# EAGLE board SparkFun_ProMicro_RP2350-Panel (EAGLE 9.6.2), part 1 of 10
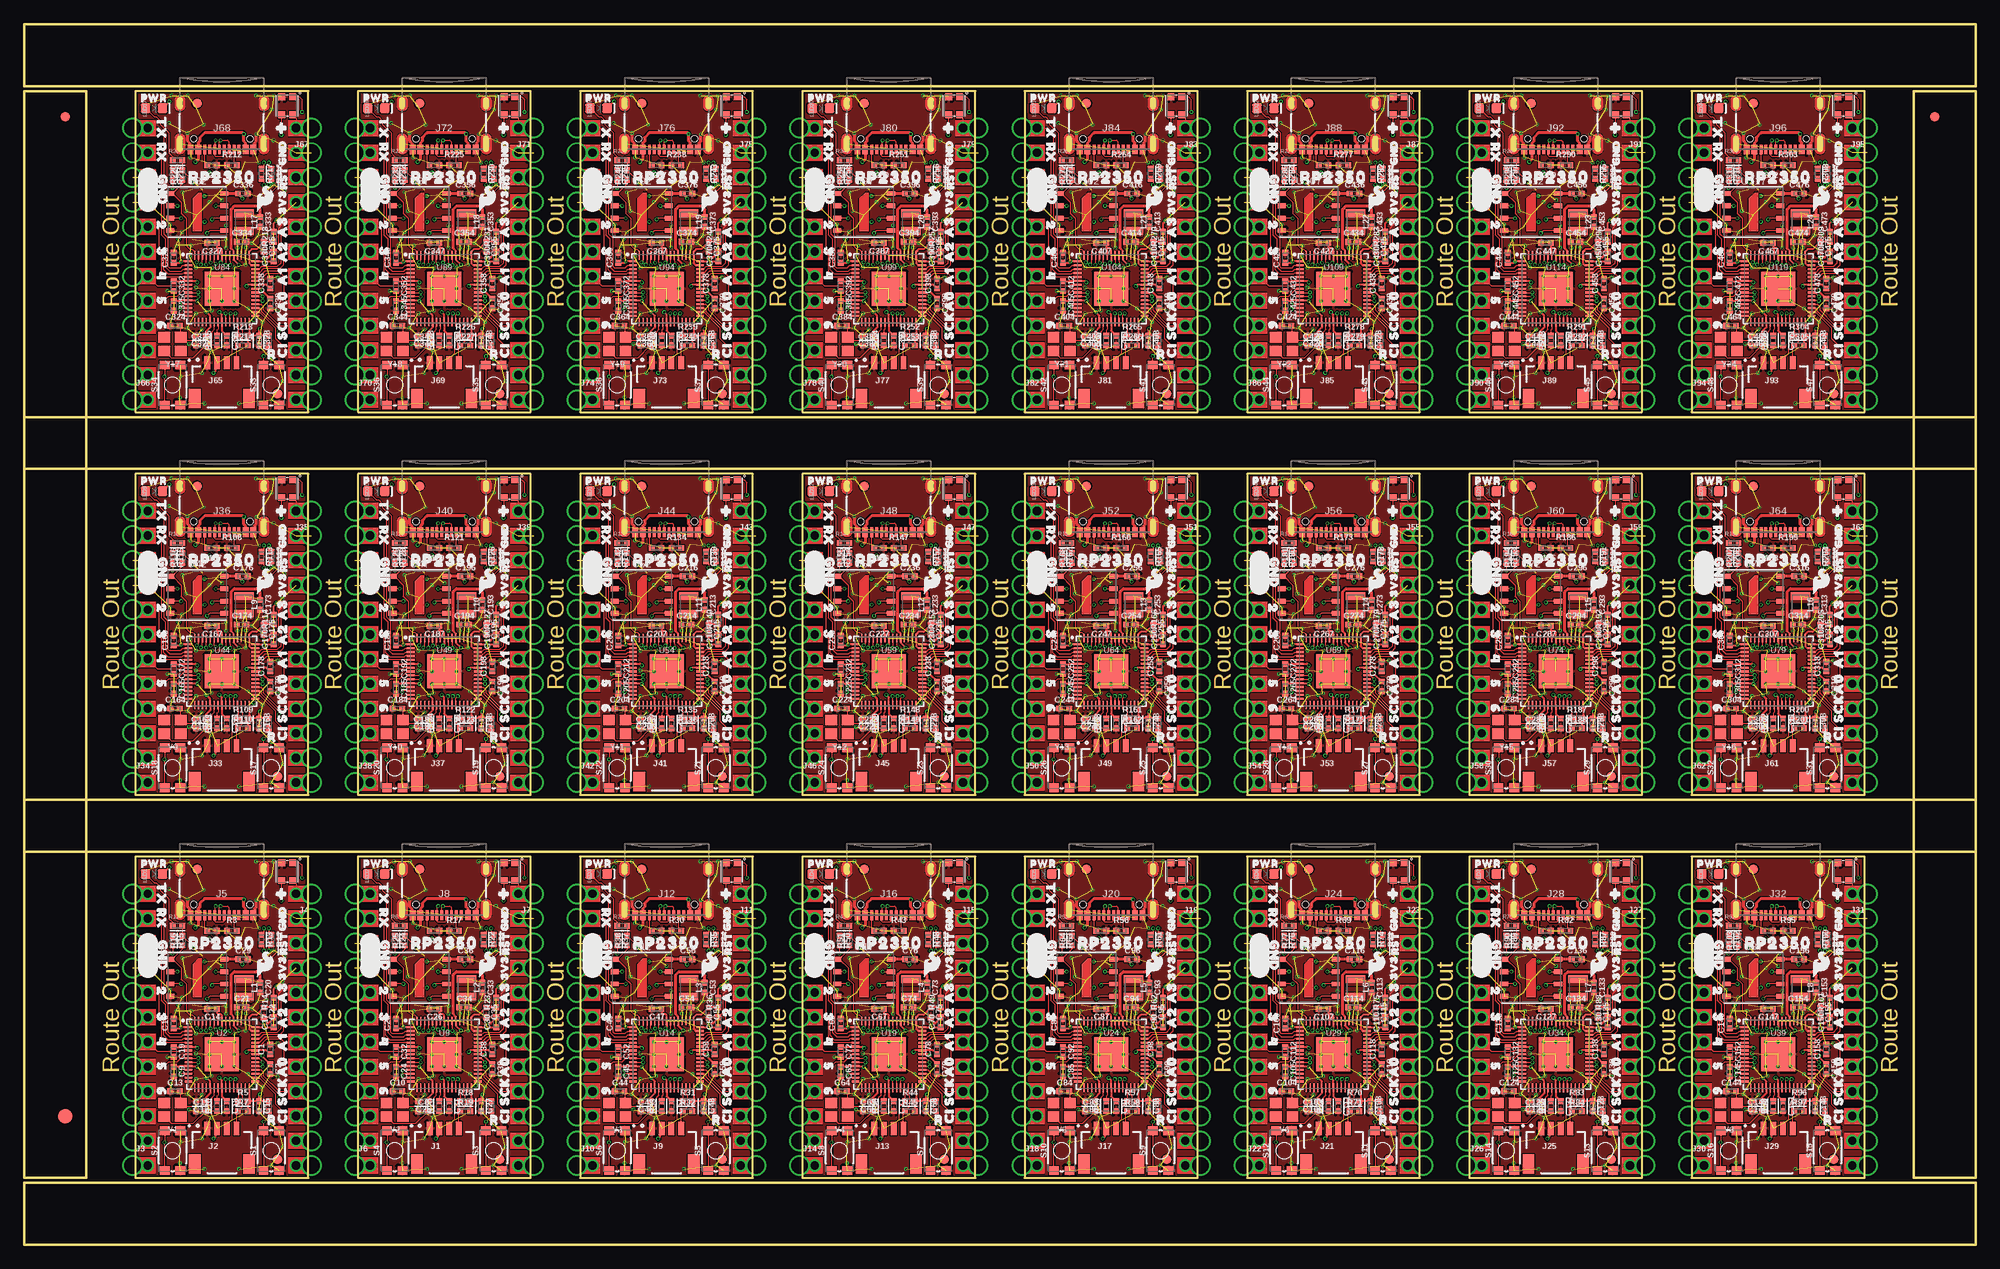
[diagram p0: board, top side]
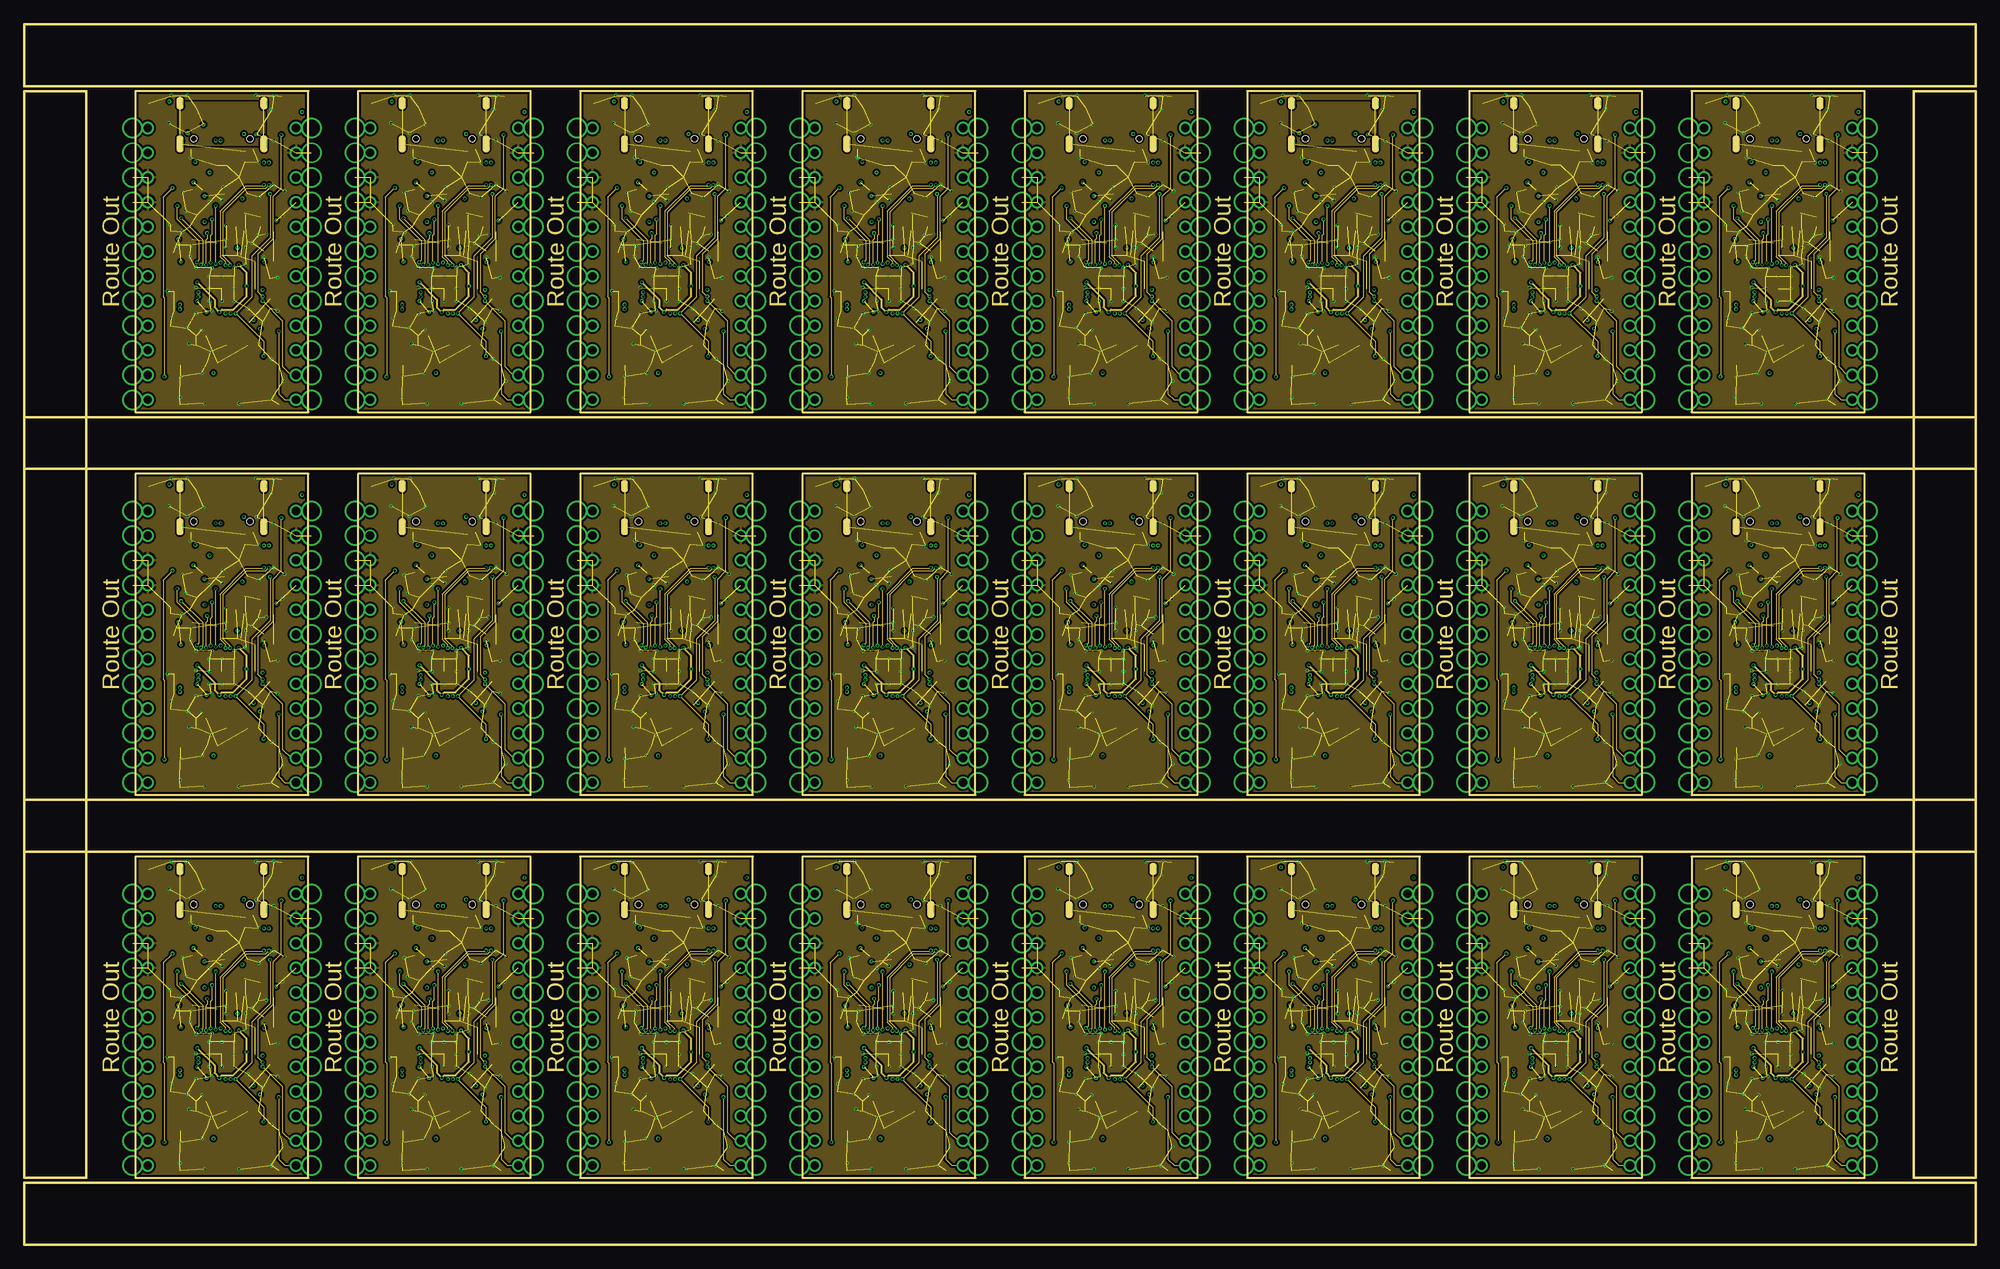
[diagram p1: board, inner layer 2]
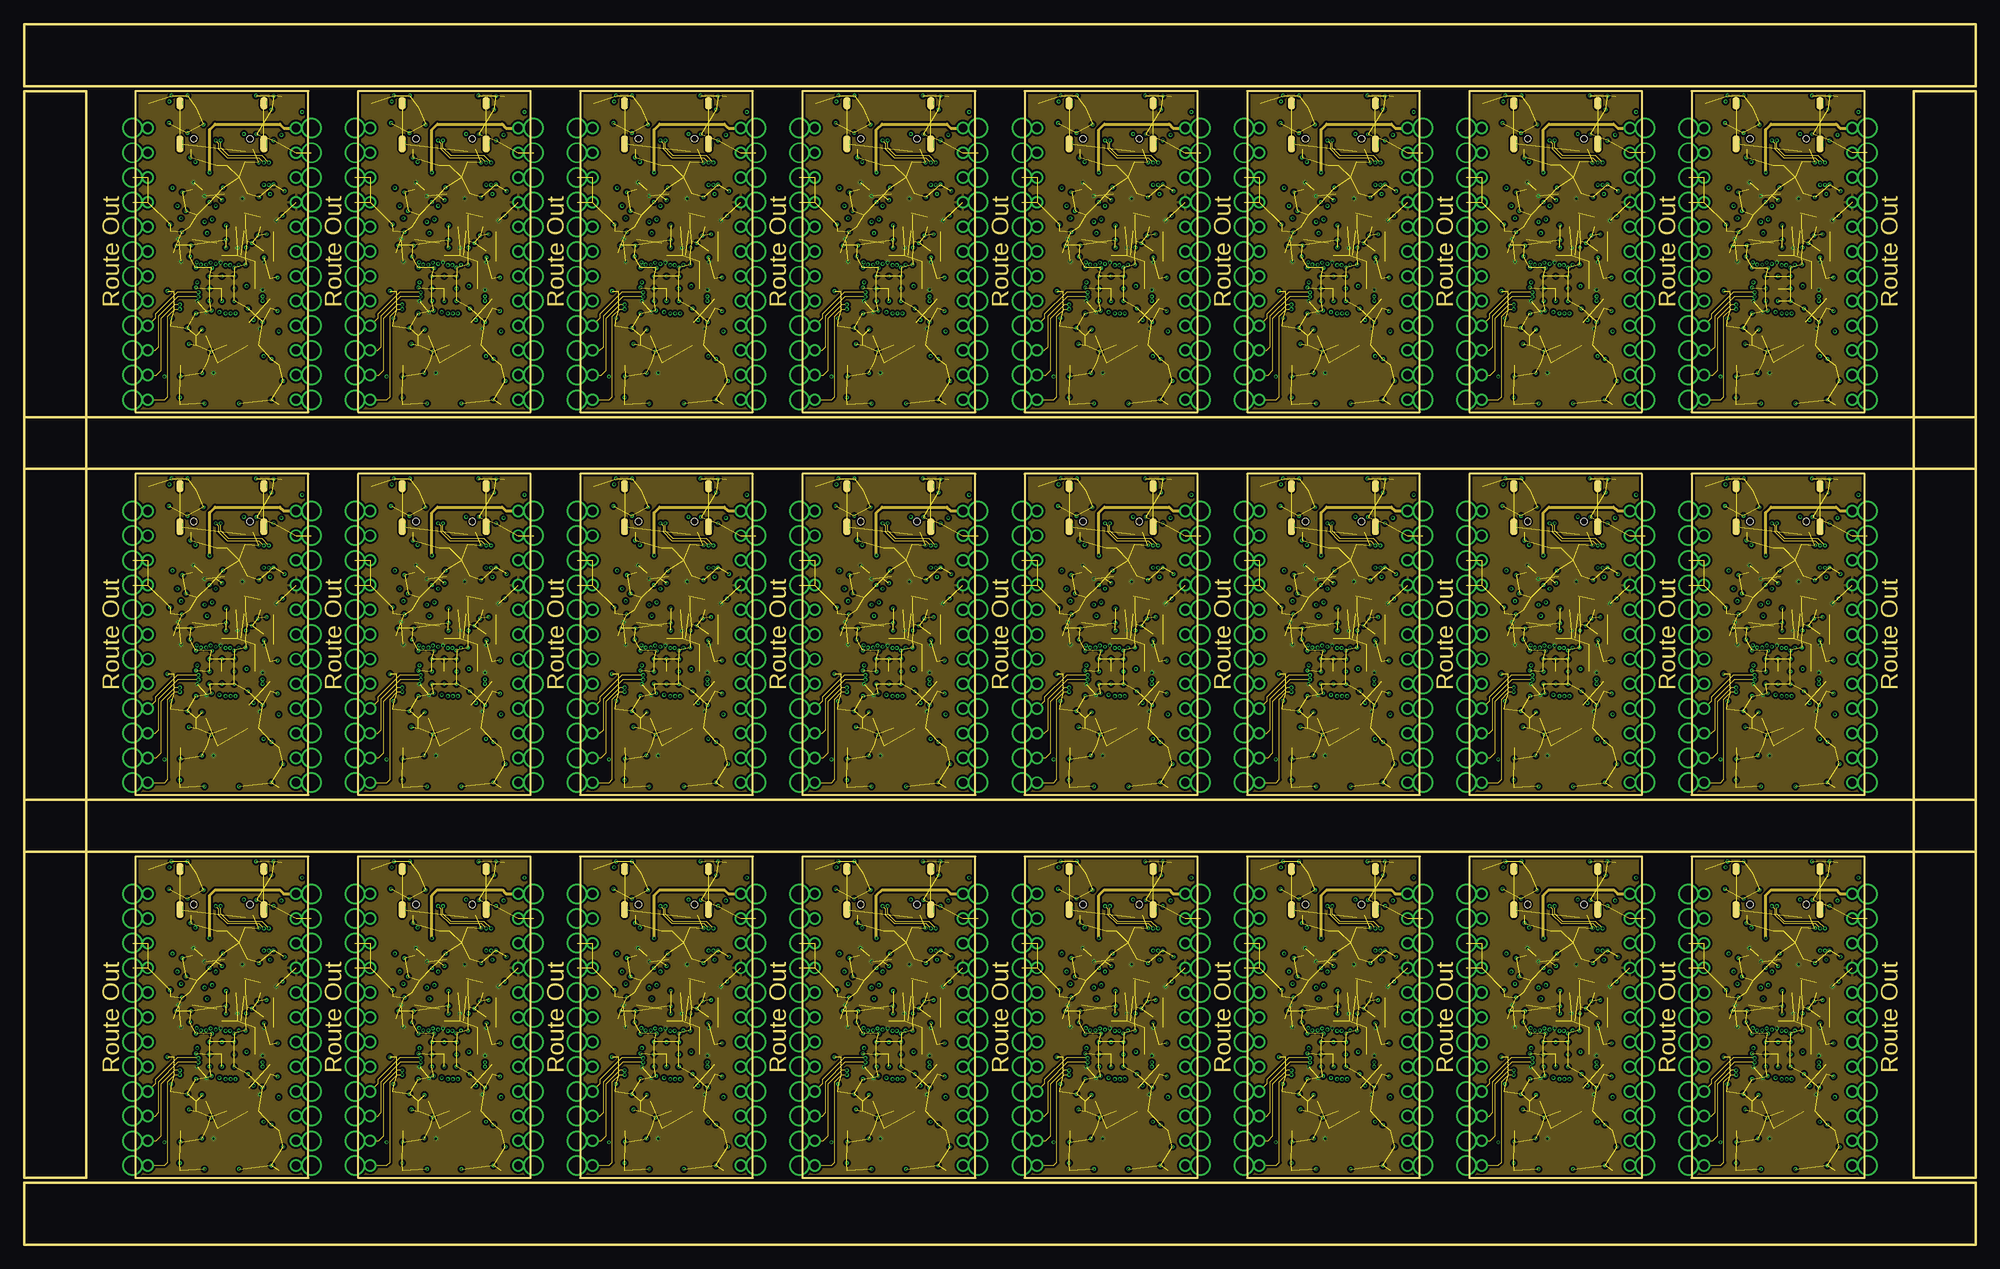
[diagram p2: board, inner layer 15]
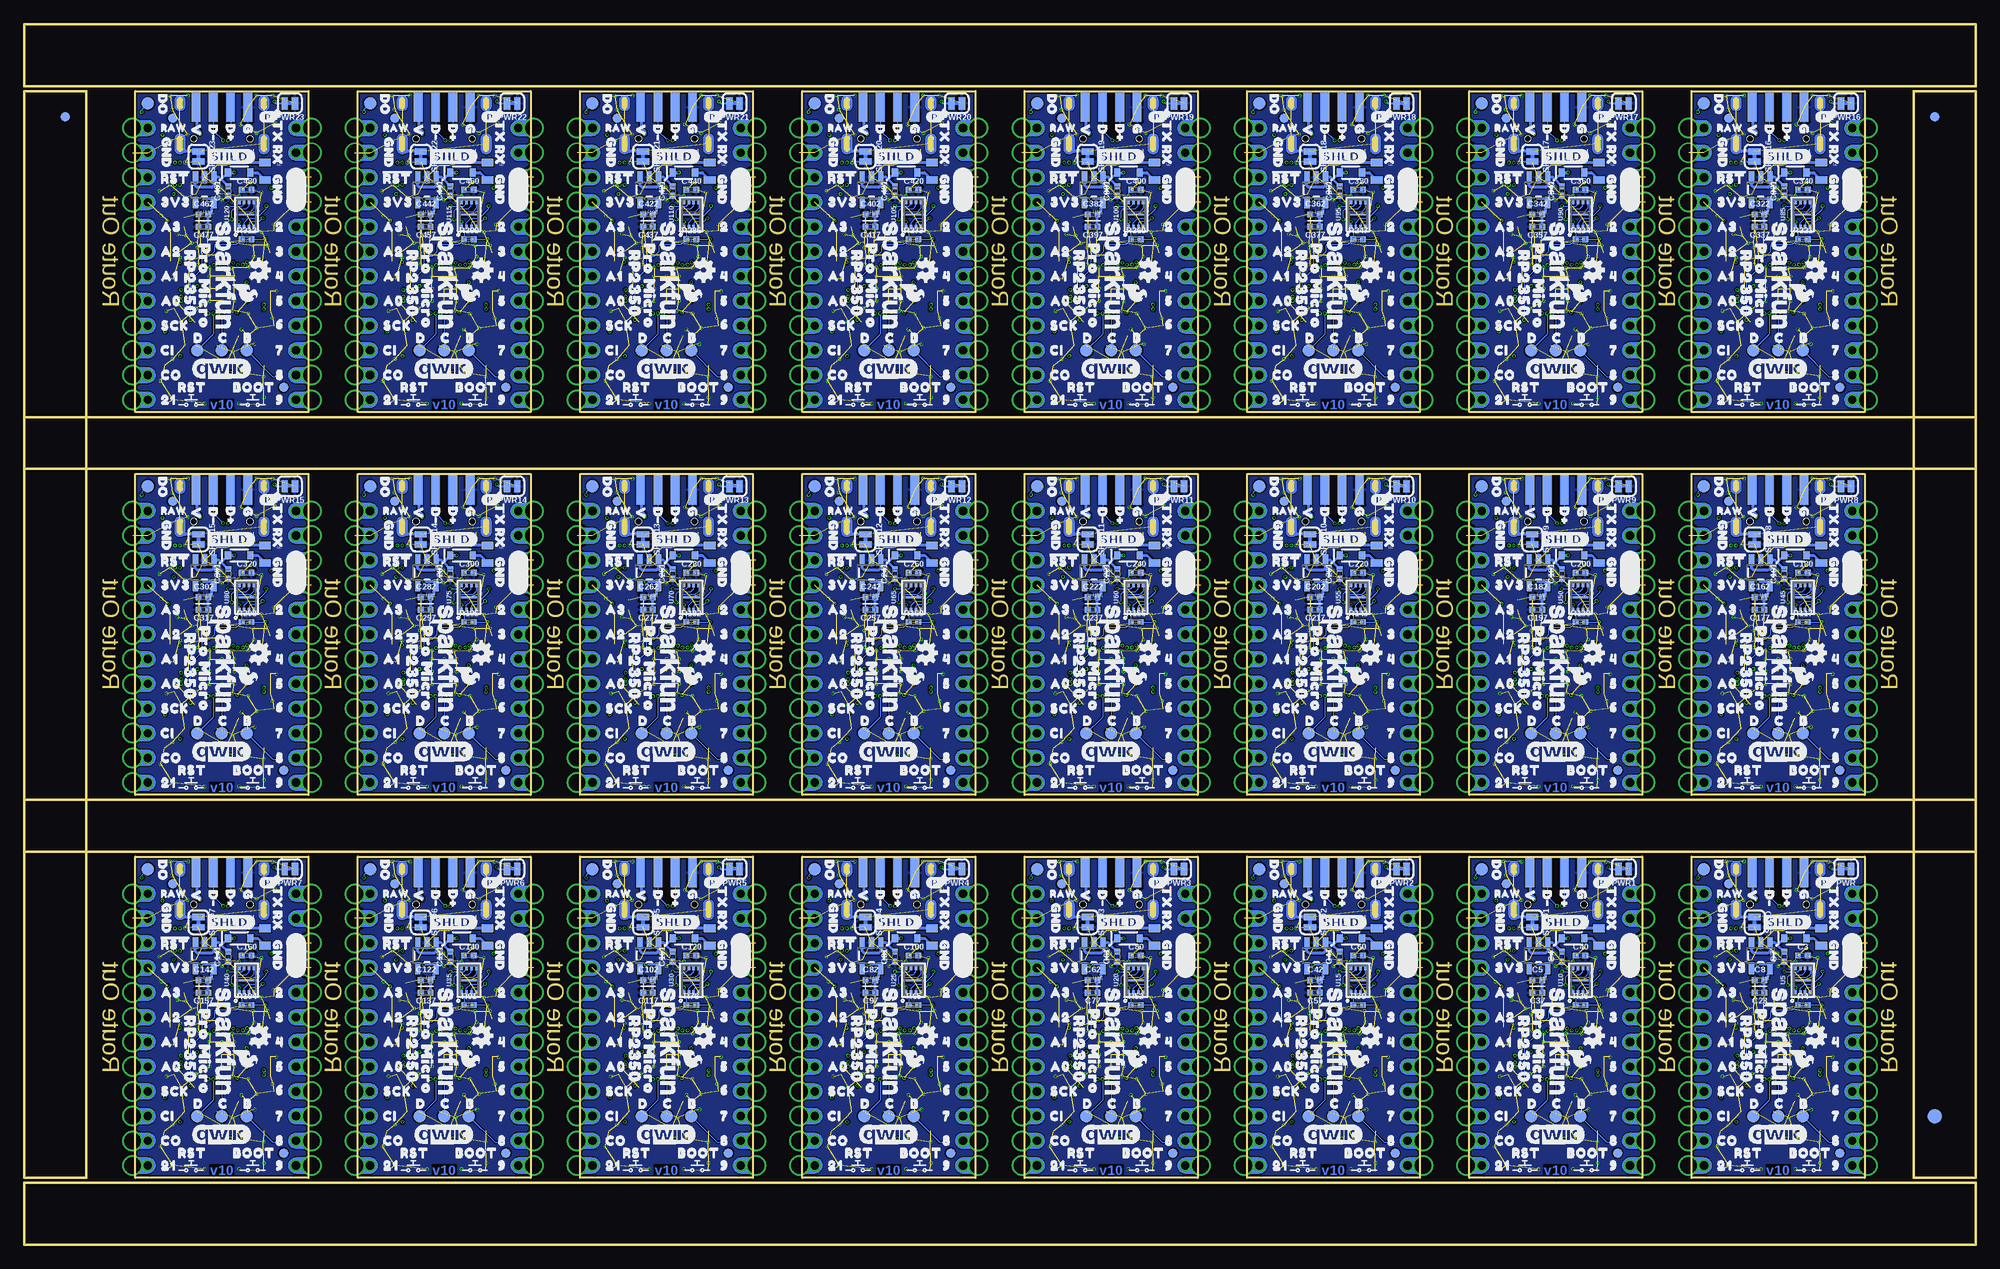
[diagram p3: board, bottom side, seen from below]

Size 200.66 x 125.48 mm. Coordinates in mm from the lower left corner, seen from the top.
Outline: 11.43,39.88 11.43,6.86 29.21,6.86 29.21,39.88 11.43,39.88
Outline: 34.29,39.88 34.29,6.86 52.07,6.86 52.07,39.88 34.29,39.88
Outline: 57.15,39.88 57.15,6.86 74.93,6.86 74.93,39.88 57.15,39.88
Outline: 80.01,39.88 80.01,6.86 97.79,6.86 97.79,39.88 80.01,39.88
Outline: 102.87,39.88 102.87,6.86 120.65,6.86 120.65,39.88 102.87,39.88
Outline: 125.73,39.88 125.73,6.86 143.51,6.86 143.51,39.88 125.73,39.88
Outline: 148.59,39.88 148.59,6.86 166.37,6.86 166.37,39.88 148.59,39.88
Outline: 171.45,39.88 171.45,6.86 189.23,6.86 189.23,39.88 171.45,39.88
Outline: 11.43,79.25 11.43,46.23 29.21,46.23 29.21,79.25 11.43,79.25
Outline: 34.29,79.25 34.29,46.23 52.07,46.23 52.07,79.25 34.29,79.25
Outline: 57.15,79.25 57.15,46.23 74.93,46.23 74.93,79.25 57.15,79.25
Outline: 80.01,79.25 80.01,46.23 97.79,46.23 97.79,79.25 80.01,79.25
Outline: 102.87,79.25 102.87,46.23 120.65,46.23 120.65,79.25 102.87,79.25
Outline: 125.73,79.25 125.73,46.23 143.51,46.23 143.51,79.25 125.73,79.25
Outline: 148.59,79.25 148.59,46.23 166.37,46.23 166.37,79.25 148.59,79.25
Outline: 171.45,79.25 171.45,46.23 189.23,46.23 189.23,79.25 171.45,79.25
Outline: 11.43,118.62 11.43,85.6 29.21,85.6 29.21,118.62 11.43,118.62
Outline: 34.29,118.62 34.29,85.6 52.07,85.6 52.07,118.62 34.29,118.62
Outline: 57.15,118.62 57.15,85.6 74.93,85.6 74.93,118.62 57.15,118.62
Outline: 80.01,118.62 80.01,85.6 97.79,85.6 97.79,118.62 80.01,118.62
Outline: 102.87,118.62 102.87,85.6 120.65,85.6 120.65,118.62 102.87,118.62
Outline: 125.73,118.62 125.73,85.6 143.51,85.6 143.51,118.62 125.73,118.62
Outline: 148.59,118.62 148.59,85.6 166.37,85.6 166.37,118.62 148.59,118.62
Outline: 171.45,118.62 171.45,85.6 189.23,85.6 189.23,118.62 171.45,118.62
Outline: 0,6.35 200.66,6.35 200.66,0 0,0 0,6.35
Outline: 194.31,118.62 200.66,118.62 200.66,6.86 194.31,6.86 194.31,118.62
Outline: 0,125.48 200.66,125.48 200.66,119.13 0,119.13 0,125.48
Outline: 0,118.62 6.35,118.62 6.35,6.86 0,6.86 0,118.62
Outline: 0,85.09 200.66,85.09 200.66,79.76 0,79.76 0,85.09
Outline: 0,45.72 200.66,45.72 200.66,40.39 0,40.39 0,45.72
Copper layers (1+2*15+16): Top 0.035mm / dielectric 1.5mm / layer 2 0.035mm / dielectric 0.15mm / layer 15 0.035mm / dielectric 0.2mm / Bottom 0.035mm
Design rules "SparkFun_ProMicro_RP2350": minimum track width 4mil, minimum drill 0.2mm, track to track 4mil, track to pad 4mil, pad to pad 4mil, via to via 4mil, smd to smd 4mil, copper to edge 6mil, drill to drill 6mil, minimum pad ring 3mil, minimum via ring 3mil, stop-mask expansion 4mil, vias tented up to drill 25mil, thermal gap 10mil
Net classes: 1 Power: width 0.127 mm, clearance 0.178 mm

## Footprints (pad centres in the part's own frame; a part is rotated, then mirrored left to right if it is on the bottom)
0402-TIGHT = smd 0.6 x 0.6: 1 -0.5,0; 2 0.5,0
SOD-323 = smd 0.63 x 0.83: A 1.15,0; C -1.15,0
FIDUCIAL-1X2 = smd 1 x 1: 1 0,0
FIDUCIAL-1.5X3 = smd 1.5 x 1.5: 1 0,0
0805 = smd 0.8 x 1.2: 1 -0.9,0; 2 0.9,0
JST04_1MM_RA = smd 0.6 x 1.35: 1 -1.5,0; 2 -0.5,0; 3 0.5,0; 4 1.5,0 | smd 1.2 x 2: NC1 2.8,-3.675; NC2 -2.8,-3.675
1X12_CASTELLATED = drill 0.85 pad 1.016: 1 0,0; 2 0,2.54; 3 0,5.08; 4 0,7.62; 5 0,10.16; 6 0,12.7; 7 0,15.24; 8 0,17.78; 9 0,20.32; 10 0,22.86; 11 0,25.4; 12 0,27.94 | drill 1.7 pad 1.75: 1B -1.57,0; 2B -1.57,2.54; 3B -1.57,5.08; 4B -1.57,7.62; 5B -1.57,10.16; 6B -1.57,12.7; 7B -1.57,15.24; 8B -1.57,17.78; 9B -1.57,20.32; 10B -1.57,22.86; 11B -1.57,25.4; 12B -1.57,27.94
USB-C-16P_4LAYER-PADS = smd 0.3 x 1: A5 -1.25,-0.34; A6 -0.25,-0.34; A7 0.25,-0.34; A8 1.25,-0.34; B5 1.75,-0.34; B6 0.75,-0.34; B7 -0.75,-0.34; B8 -1.75,-0.34 | smd 0.6 x 1: GND -3.225,-0.34; GND2 3.225,-0.34; VBUS1 -2.45,-0.34; VBUS2 2.45,-0.34 | drill 0.4 pad 0.6 long: SHLD1 -4.318,-0.915; SHLD2 4.318,-0.915; SHLD3 -4.318,-5.095; SHLD4 4.318,-5.095 | hole 0.65: -2.89,-1.445; 2.89,-1.445
USB-SOLDER-PADS = smd 3 x 0.9: D+ 0,-0.889; D- 0,0.889; GND 0,-2.667; VBUS 0,2.667
1008(2520) = smd 0.8 x 2: 1 -0.9,0; 2 0.9,0
LED-0603 = smd 1 x 1: A -0.877,0; C 0.877,0
SMT-JUMPER_2_NC_TRACE_SILK = smd 0.66 x 1.27: 1 -0.521,0; 2 0.521,0
TACTILE_SWITCH_SMD_4.6X2.8MM = smd 0.9 x 1: 1 -2.05,-0.8; 2 2.05,-0.8; 3 2.05,0.8; 4 -2.05,0.8
PAD.03X.05 = smd 1.27 x 1.27: 1 0,0
SOT23-5 = smd 0.55 x 1.2: 1 -0.95,-1.3; 2 0,-1.3; 3 0.95,-1.3; 4 0.95,1.3; 5 -0.95,1.3
RP2350A = smd 0.875 x 0.2: 1 -3.437,2.8; 2 -3.437,2.4; 3 -3.437,2; 4 -3.437,1.6; 5 -3.437,1.2; 6 -3.437,0.8; 7 -3.437,0.4; 8 -3.437,0; 9 -3.437,-0.4; 10 -3.437,-0.8; 11 -3.437,-1.2; 12 -3.437,-1.6; 13 -3.437,-2; 14 -3.437,-2.4; 15 -3.437,-2.8; 31 3.437,-2.8; 32 3.437,-2.4; 33 3.437,-2; 34 3.437,-1.6; 35 3.437,-1.2; 36 3.437,-0.8; 37 3.437,-0.4; 38 3.437,0; 39 3.437,0.4; 40 3.437,0.8; 41 3.437,1.2; 42 3.437,1.6; 43 3.437,2; 44 3.437,2.4; 45 3.437,2.8 | smd 0.2 x 0.875: 16 -2.8,-3.437; 17 -2.4,-3.437; 18 -2,-3.437; 19 -1.6,-3.437; 20 -1.2,-3.437; 21 -0.8,-3.437; 22 -0.4,-3.437; 23 0,-3.437; 24 0.4,-3.437; 25 0.8,-3.437; 26 1.2,-3.437; 27 1.6,-3.437; 28 2,-3.437; 29 2.4,-3.437; 30 2.8,-3.437; 46 2.8,3.437; 47 2.4,3.437; 48 2,3.437; 49 1.6,3.437; 50 1.2,3.437; 51 0.8,3.437; 52 0.4,3.437; 53 0,3.437; 54 -0.4,3.437; 55 -0.8,3.437; 56 -1.2,3.437; 57 -1.6,3.437; 58 -2,3.437; 59 -2.4,3.437; 60 -2.8,3.437 | smd 3.5 x 3.5: EPAD 0,0
WS2812-2020 = smd 0.7 x 0.7: DI -0.915,0.55; DO 0.915,-0.55; GND 0.915,0.55; VCC -0.915,-0.55
WSON-8-6X5-SKINNY_CENTERPAD = smd 0.85 x 0.5: 1 -2.775,1.905; 2 -2.775,0.635; 3 -2.775,-0.635; 4 -2.775,-1.905; 5 2.775,-1.905; 6 2.775,-0.635; 7 2.775,0.635; 8 2.775,1.905
APS6404L-3SQR-ZR = smd 0.4 x 0.25: 1 -1.25,0.75; 2 -1.25,0.25; 3 -1.25,-0.25; 4 -1.25,-0.75; 5 1.25,-0.75; 6 1.25,-0.25; 7 1.25,0.25; 8 1.25,0.75 | smd 0.2 x 1.6: 9 0,0
CRYSTAL-SMD-2X2.5MM = smd 1.2 x 1.1: P1 0.846,0.69; P2 -0.854,0.69; P3 -0.854,-0.71; P4 0.846,-0.71

## Placement (x,y rotation side)
C1  0.1uF  [0402-TIGHT]  25.27,20.07 90 top
C2  0.1uF  [0402-TIGHT]  25.27,18.03 270 top
C3  0.1uF  [0402-TIGHT]  17.78,29.72 0 bottom
C4  10uF  [0402-TIGHT]  42.55,29.59 90 bottom
C5  10uF  [0402-TIGHT]  45.09,27.18 0 bottom
C6  15pF  [0402-TIGHT]  41.02,13.72 0 top
C7  10uF  [0402-TIGHT]  19.69,29.59 90 bottom
C8  10uF  [0402-TIGHT]  22.23,27.18 0 bottom
C9  0.1uF  [0402-TIGHT]  15.37,17.78 270 top
C10  15pF  [0402-TIGHT]  38.35,15.75 0 top
C11  15pF  [0402-TIGHT]  18.16,13.72 0 top
C12  0.1uF  [0402-TIGHT]  18.16,14.73 180 top
C13  15pF  [0402-TIGHT]  15.49,15.75 0 top
C14  0.1uF  [0402-TIGHT]  19.3,24.26 180 top
C15  0.1uF  [0402-TIGHT]  24.13,14.22 270 top
C16  0.1uF  [0402-TIGHT]  15.37,22.73 90 top
C17  0.1uF  [0402-TIGHT]  25.65,22.86 90 top
C18  0.1uF  [0402-TIGHT]  20.83,14.22 270 top
C19  0.1uF  [0402-TIGHT]  15.37,19.81 270 top
C20  10uF  [0402-TIGHT]  24.26,26.42 270 top
C21  10uF  [0402-TIGHT]  22.35,24.38 0 top
C22  2.2uF  [0402-TIGHT]  24.64,23.88 270 top
C23  2.2uF  [0402-TIGHT]  22.23,25.91 180 bottom
C24  0.1uF  [0402-TIGHT]  38.23,17.78 270 top
C25  0.1uF  [0402-TIGHT]  41.02,14.73 180 top
C26  0.1uF  [0402-TIGHT]  42.16,24.26 180 top
C27  0.1uF  [0402-TIGHT]  46.99,14.22 270 top
C28  0.1uF  [0402-TIGHT]  38.23,22.73 90 top
C29  0.1uF  [0402-TIGHT]  22.48,29.34 0 top
C30  0.1uF  [0402-TIGHT]  48.51,22.86 90 top
C31  0.1uF  [0402-TIGHT]  43.69,14.22 270 top
C32  0.1uF  [0402-TIGHT]  38.23,19.81 270 top
C33  10uF  [0402-TIGHT]  47.12,26.42 270 top
C34  10uF  [0402-TIGHT]  45.21,24.38 0 top
C35  2.2uF  [0402-TIGHT]  47.5,23.88 270 top
C36  0.1uF  [0402-TIGHT]  45.34,29.34 0 top
C37  2.2uF  [0402-TIGHT]  45.09,25.91 180 bottom
C38  0.1uF  [0402-TIGHT]  48.13,20.07 90 top
C39  0.1uF  [0402-TIGHT]  48.13,18.03 270 top
C40  0.1uF  [0402-TIGHT]  40.64,29.72 0 bottom
C41  10uF  [0402-TIGHT]  65.41,29.59 90 bottom
C42  10uF  [0402-TIGHT]  67.94,27.18 0 bottom
C43  15pF  [0402-TIGHT]  63.88,13.72 0 top
C44  15pF  [0402-TIGHT]  61.21,15.75 0 top
C45  0.1uF  [0402-TIGHT]  61.09,17.78 270 top
C46  0.1uF  [0402-TIGHT]  63.88,14.73 180 top
C47  0.1uF  [0402-TIGHT]  65.02,24.26 180 top
C48  0.1uF  [0402-TIGHT]  69.85,14.22 270 top
C49  0.1uF  [0402-TIGHT]  61.09,22.73 90 top
C50  0.1uF  [0402-TIGHT]  71.37,22.86 90 top
C51  0.1uF  [0402-TIGHT]  66.55,14.22 270 top
C52  0.1uF  [0402-TIGHT]  61.09,19.81 270 top
C53  10uF  [0402-TIGHT]  69.98,26.42 270 top
C54  10uF  [0402-TIGHT]  68.07,24.38 0 top
C55  2.2uF  [0402-TIGHT]  70.36,23.88 270 top
C56  0.1uF  [0402-TIGHT]  68.2,29.34 0 top
C57  2.2uF  [0402-TIGHT]  67.94,25.91 180 bottom
C58  0.1uF  [0402-TIGHT]  70.99,20.07 90 top
C59  0.1uF  [0402-TIGHT]  70.99,18.03 270 top
C60  0.1uF  [0402-TIGHT]  63.5,29.72 0 bottom
C61  10uF  [0402-TIGHT]  88.26,29.59 90 bottom
C62  10uF  [0402-TIGHT]  90.81,27.18 0 bottom
C63  15pF  [0402-TIGHT]  86.74,13.72 0 top
C64  15pF  [0402-TIGHT]  84.07,15.75 0 top
C65  0.1uF  [0402-TIGHT]  83.95,17.78 270 top
C66  0.1uF  [0402-TIGHT]  86.74,14.73 180 top
C67  0.1uF  [0402-TIGHT]  87.88,24.26 180 top
C68  0.1uF  [0402-TIGHT]  92.71,14.22 270 top
C69  0.1uF  [0402-TIGHT]  83.95,22.73 90 top
C70  0.1uF  [0402-TIGHT]  94.23,22.86 90 top
C71  0.1uF  [0402-TIGHT]  89.41,14.22 270 top
C72  0.1uF  [0402-TIGHT]  83.95,19.81 270 top
C73  10uF  [0402-TIGHT]  92.84,26.42 270 top
C74  10uF  [0402-TIGHT]  90.93,24.38 0 top
C75  2.2uF  [0402-TIGHT]  93.22,23.88 270 top
C76  0.1uF  [0402-TIGHT]  91.06,29.34 0 top
C77  2.2uF  [0402-TIGHT]  90.81,25.91 180 bottom
C78  0.1uF  [0402-TIGHT]  93.85,20.07 90 top
C79  0.1uF  [0402-TIGHT]  93.85,18.03 270 top
C80  0.1uF  [0402-TIGHT]  86.36,29.72 0 bottom
C81  10uF  [0402-TIGHT]  111.12,29.59 90 bottom
C82  10uF  [0402-TIGHT]  113.66,27.18 0 bottom
C83  15pF  [0402-TIGHT]  109.6,13.72 0 top
C84  15pF  [0402-TIGHT]  106.93,15.75 0 top
C85  0.1uF  [0402-TIGHT]  106.81,17.78 270 top
C86  0.1uF  [0402-TIGHT]  109.6,14.73 180 top
C87  0.1uF  [0402-TIGHT]  110.74,24.26 180 top
C88  0.1uF  [0402-TIGHT]  115.57,14.22 270 top
C89  0.1uF  [0402-TIGHT]  106.81,22.73 90 top
C90  0.1uF  [0402-TIGHT]  117.09,22.86 90 top
C91  0.1uF  [0402-TIGHT]  112.27,14.22 270 top
C92  0.1uF  [0402-TIGHT]  106.81,19.81 270 top
C93  10uF  [0402-TIGHT]  115.7,26.42 270 top
C94  10uF  [0402-TIGHT]  113.79,24.38 0 top
C95  2.2uF  [0402-TIGHT]  116.08,23.88 270 top
C96  0.1uF  [0402-TIGHT]  113.92,29.34 0 top
C97  2.2uF  [0402-TIGHT]  113.66,25.91 180 bottom
C98  0.1uF  [0402-TIGHT]  116.71,20.07 90 top
C99  0.1uF  [0402-TIGHT]  116.71,18.03 270 top
C100  0.1uF  [0402-TIGHT]  109.22,29.72 0 bottom
C101  10uF  [0402-TIGHT]  133.99,29.59 90 bottom
C102  10uF  [0402-TIGHT]  136.53,27.18 0 bottom
C103  15pF  [0402-TIGHT]  132.46,13.72 0 top
C104  15pF  [0402-TIGHT]  129.79,15.75 0 top
C105  0.1uF  [0402-TIGHT]  129.67,17.78 270 top
C106  0.1uF  [0402-TIGHT]  132.46,14.73 180 top
C107  0.1uF  [0402-TIGHT]  133.6,24.26 180 top
C108  0.1uF  [0402-TIGHT]  138.43,14.22 270 top
C109  0.1uF  [0402-TIGHT]  129.67,22.73 90 top
C110  0.1uF  [0402-TIGHT]  139.95,22.86 90 top
C111  0.1uF  [0402-TIGHT]  135.13,14.22 270 top
C112  0.1uF  [0402-TIGHT]  129.67,19.81 270 top
C113  10uF  [0402-TIGHT]  138.56,26.42 270 top
C114  10uF  [0402-TIGHT]  136.65,24.38 0 top
C115  2.2uF  [0402-TIGHT]  138.94,23.88 270 top
C116  0.1uF  [0402-TIGHT]  136.78,29.34 0 top
C117  2.2uF  [0402-TIGHT]  136.53,25.91 180 bottom
C118  0.1uF  [0402-TIGHT]  139.57,20.07 90 top
C119  0.1uF  [0402-TIGHT]  139.57,18.03 270 top
C120  0.1uF  [0402-TIGHT]  132.08,29.72 0 bottom
C121  10uF  [0402-TIGHT]  156.84,29.59 90 bottom
C122  10uF  [0402-TIGHT]  159.39,27.18 0 bottom
C123  15pF  [0402-TIGHT]  155.32,13.72 0 top
C124  15pF  [0402-TIGHT]  152.65,15.75 0 top
C125  0.1uF  [0402-TIGHT]  152.53,17.78 270 top
C126  0.1uF  [0402-TIGHT]  155.32,14.73 180 top
C127  0.1uF  [0402-TIGHT]  156.46,24.26 180 top
C128  0.1uF  [0402-TIGHT]  161.29,14.22 270 top
C129  0.1uF  [0402-TIGHT]  152.53,22.73 90 top
C130  0.1uF  [0402-TIGHT]  162.81,22.86 90 top
C131  0.1uF  [0402-TIGHT]  157.99,14.22 270 top
C132  0.1uF  [0402-TIGHT]  152.53,19.81 270 top
C133  10uF  [0402-TIGHT]  161.42,26.42 270 top
C134  10uF  [0402-TIGHT]  159.51,24.38 0 top
C135  2.2uF  [0402-TIGHT]  161.8,23.88 270 top
C136  0.1uF  [0402-TIGHT]  159.64,29.34 0 top
C137  2.2uF  [0402-TIGHT]  159.39,25.91 180 bottom
C138  0.1uF  [0402-TIGHT]  162.43,20.07 90 top
C139  0.1uF  [0402-TIGHT]  162.43,18.03 270 top
C140  0.1uF  [0402-TIGHT]  154.94,29.72 0 bottom
C141  10uF  [0402-TIGHT]  179.71,29.59 90 bottom
C142  10uF  [0402-TIGHT]  182.25,27.18 0 bottom
C143  15pF  [0402-TIGHT]  178.18,13.72 0 top
C144  15pF  [0402-TIGHT]  175.51,15.75 0 top
C145  0.1uF  [0402-TIGHT]  175.39,17.78 270 top
C146  0.1uF  [0402-TIGHT]  178.18,14.73 180 top
C147  0.1uF  [0402-TIGHT]  179.32,24.26 180 top
C148  0.1uF  [0402-TIGHT]  184.15,14.22 270 top
C149  0.1uF  [0402-TIGHT]  175.39,22.73 90 top
C150  0.1uF  [0402-TIGHT]  185.67,22.86 90 top
C151  0.1uF  [0402-TIGHT]  180.85,14.22 270 top
C152  0.1uF  [0402-TIGHT]  175.39,19.81 270 top
C153  10uF  [0402-TIGHT]  184.28,26.42 270 top
C154  10uF  [0402-TIGHT]  182.37,24.38 0 top
C155  2.2uF  [0402-TIGHT]  184.66,23.88 270 top
C156  0.1uF  [0402-TIGHT]  182.5,29.34 0 top
C157  2.2uF  [0402-TIGHT]  182.25,25.91 180 bottom
C158  0.1uF  [0402-TIGHT]  185.29,20.07 90 top
C159  0.1uF  [0402-TIGHT]  185.29,18.03 270 top
C160  0.1uF  [0402-TIGHT]  177.8,29.72 0 bottom
C161  10uF  [0402-TIGHT]  19.69,68.96 90 bottom
C162  10uF  [0402-TIGHT]  22.23,66.55 0 bottom
C163  15pF  [0402-TIGHT]  18.16,53.09 0 top
C164  15pF  [0402-TIGHT]  15.49,55.12 0 top
C165  0.1uF  [0402-TIGHT]  15.37,57.15 270 top
C166  0.1uF  [0402-TIGHT]  18.16,54.1 180 top
C167  0.1uF  [0402-TIGHT]  19.3,63.63 180 top
C168  0.1uF  [0402-TIGHT]  24.13,53.59 270 top
C169  0.1uF  [0402-TIGHT]  15.37,62.1 90 top
C170  0.1uF  [0402-TIGHT]  25.65,62.23 90 top
C171  0.1uF  [0402-TIGHT]  20.83,53.59 270 top
C172  0.1uF  [0402-TIGHT]  15.37,59.18 270 top
C173  10uF  [0402-TIGHT]  24.26,65.79 270 top
C174  10uF  [0402-TIGHT]  22.35,63.75 0 top
C175  2.2uF  [0402-TIGHT]  24.64,63.25 270 top
C176  0.1uF  [0402-TIGHT]  22.48,68.71 0 top
C177  2.2uF  [0402-TIGHT]  22.23,65.28 180 bottom
C178  0.1uF  [0402-TIGHT]  25.27,59.44 90 top
C179  0.1uF  [0402-TIGHT]  25.27,57.4 270 top
C180  0.1uF  [0402-TIGHT]  17.78,69.09 0 bottom
C181  10uF  [0402-TIGHT]  42.55,68.96 90 bottom
C182  10uF  [0402-TIGHT]  45.09,66.55 0 bottom
C183  15pF  [0402-TIGHT]  41.02,53.09 0 top
C184  15pF  [0402-TIGHT]  38.35,55.12 0 top
C185  0.1uF  [0402-TIGHT]  38.23,57.15 270 top
C186  0.1uF  [0402-TIGHT]  41.02,54.1 180 top
C187  0.1uF  [0402-TIGHT]  42.16,63.63 180 top
C188  0.1uF  [0402-TIGHT]  46.99,53.59 270 top
C189  0.1uF  [0402-TIGHT]  38.23,62.1 90 top
C190  0.1uF  [0402-TIGHT]  48.51,62.23 90 top
C191  0.1uF  [0402-TIGHT]  43.69,53.59 270 top
C192  0.1uF  [0402-TIGHT]  38.23,59.18 270 top
C193  10uF  [0402-TIGHT]  47.12,65.79 270 top
C194  10uF  [0402-TIGHT]  45.21,63.75 0 top
C195  2.2uF  [0402-TIGHT]  47.5,63.25 270 top
C196  0.1uF  [0402-TIGHT]  45.34,68.71 0 top
C197  2.2uF  [0402-TIGHT]  45.09,65.28 180 bottom
C198  0.1uF  [0402-TIGHT]  48.13,59.44 90 top
C199  0.1uF  [0402-TIGHT]  48.13,57.4 270 top
C200  0.1uF  [0402-TIGHT]  40.64,69.09 0 bottom
C201  10uF  [0402-TIGHT]  65.41,68.96 90 bottom
C202  10uF  [0402-TIGHT]  67.94,66.55 0 bottom
C203  15pF  [0402-TIGHT]  63.88,53.09 0 top
C204  15pF  [0402-TIGHT]  61.21,55.12 0 top
C205  0.1uF  [0402-TIGHT]  61.09,57.15 270 top
C206  0.1uF  [0402-TIGHT]  63.88,54.1 180 top
C207  0.1uF  [0402-TIGHT]  65.02,63.63 180 top
C208  0.1uF  [0402-TIGHT]  69.85,53.59 270 top
C209  0.1uF  [0402-TIGHT]  61.09,62.1 90 top
C210  0.1uF  [0402-TIGHT]  71.37,62.23 90 top
C211  0.1uF  [0402-TIGHT]  66.55,53.59 270 top
C212  0.1uF  [0402-TIGHT]  61.09,59.18 270 top
C213  10uF  [0402-TIGHT]  69.98,65.79 270 top
C214  10uF  [0402-TIGHT]  68.07,63.75 0 top
C215  2.2uF  [0402-TIGHT]  70.36,63.25 270 top
C216  0.1uF  [0402-TIGHT]  68.2,68.71 0 top
C217  2.2uF  [0402-TIGHT]  67.94,65.28 180 bottom
C218  0.1uF  [0402-TIGHT]  70.99,59.44 90 top
C219  0.1uF  [0402-TIGHT]  70.99,57.4 270 top
C220  0.1uF  [0402-TIGHT]  63.5,69.09 0 bottom
C221  10uF  [0402-TIGHT]  88.26,68.96 90 bottom
C222  10uF  [0402-TIGHT]  90.81,66.55 0 bottom
C223  15pF  [0402-TIGHT]  86.74,53.09 0 top
C224  15pF  [0402-TIGHT]  84.07,55.12 0 top
C225  0.1uF  [0402-TIGHT]  83.95,57.15 270 top
C226  0.1uF  [0402-TIGHT]  86.74,54.1 180 top
C227  0.1uF  [0402-TIGHT]  87.88,63.63 180 top
C228  0.1uF  [0402-TIGHT]  92.71,53.59 270 top
C229  0.1uF  [0402-TIGHT]  83.95,62.1 90 top
C230  0.1uF  [0402-TIGHT]  94.23,62.23 90 top
C231  0.1uF  [0402-TIGHT]  89.41,53.59 270 top
C232  0.1uF  [0402-TIGHT]  83.95,59.18 270 top
C233  10uF  [0402-TIGHT]  92.84,65.79 270 top
C234  10uF  [0402-TIGHT]  90.93,63.75 0 top
C235  2.2uF  [0402-TIGHT]  93.22,63.25 270 top
C236  0.1uF  [0402-TIGHT]  91.06,68.71 0 top
C237  2.2uF  [0402-TIGHT]  90.81,65.28 180 bottom
C238  0.1uF  [0402-TIGHT]  93.85,59.44 90 top
C239  0.1uF  [0402-TIGHT]  93.85,57.4 270 top
C240  0.1uF  [0402-TIGHT]  86.36,69.09 0 bottom
C241  10uF  [0402-TIGHT]  111.12,68.96 90 bottom
C242  10uF  [0402-TIGHT]  113.66,66.55 0 bottom
C243  15pF  [0402-TIGHT]  109.6,53.09 0 top
C244  15pF  [0402-TIGHT]  106.93,55.12 0 top
C245  0.1uF  [0402-TIGHT]  106.81,57.15 270 top
C246  0.1uF  [0402-TIGHT]  109.6,54.1 180 top
C247  0.1uF  [0402-TIGHT]  110.74,63.63 180 top
C248  0.1uF  [0402-TIGHT]  115.57,53.59 270 top
C249  0.1uF  [0402-TIGHT]  106.81,62.1 90 top
C250  0.1uF  [0402-TIGHT]  117.09,62.23 90 top
C251  0.1uF  [0402-TIGHT]  112.27,53.59 270 top
C252  0.1uF  [0402-TIGHT]  106.81,59.18 270 top
C253  10uF  [0402-TIGHT]  115.7,65.79 270 top
C254  10uF  [0402-TIGHT]  113.79,63.75 0 top
C255  2.2uF  [0402-TIGHT]  116.08,63.25 270 top
C256  0.1uF  [0402-TIGHT]  113.92,68.71 0 top
C257  2.2uF  [0402-TIGHT]  113.66,65.28 180 bottom
C258  0.1uF  [0402-TIGHT]  116.71,59.44 90 top
C259  0.1uF  [0402-TIGHT]  116.71,57.4 270 top
C260  0.1uF  [0402-TIGHT]  109.22,69.09 0 bottom
C261  10uF  [0402-TIGHT]  133.99,68.96 90 bottom
C262  10uF  [0402-TIGHT]  136.53,66.55 0 bottom
C263  15pF  [0402-TIGHT]  132.46,53.09 0 top
C264  15pF  [0402-TIGHT]  129.79,55.12 0 top
C265  0.1uF  [0402-TIGHT]  129.67,57.15 270 top
C266  0.1uF  [0402-TIGHT]  132.46,54.1 180 top
C267  0.1uF  [0402-TIGHT]  133.6,63.63 180 top
C268  0.1uF  [0402-TIGHT]  138.43,53.59 270 top
C269  0.1uF  [0402-TIGHT]  129.67,62.1 90 top
C270  0.1uF  [0402-TIGHT]  139.95,62.23 90 top
C271  0.1uF  [0402-TIGHT]  135.13,53.59 270 top
C272  0.1uF  [0402-TIGHT]  129.67,59.18 270 top
C273  10uF  [0402-TIGHT]  138.56,65.79 270 top
C274  10uF  [0402-TIGHT]  136.65,63.75 0 top
C275  2.2uF  [0402-TIGHT]  138.94,63.25 270 top
C276  0.1uF  [0402-TIGHT]  136.78,68.71 0 top
C277  2.2uF  [0402-TIGHT]  136.53,65.28 180 bottom
C278  0.1uF  [0402-TIGHT]  139.57,59.44 90 top
C279  0.1uF  [0402-TIGHT]  139.57,57.4 270 top
C280  0.1uF  [0402-TIGHT]  132.08,69.09 0 bottom
C281  10uF  [0402-TIGHT]  156.84,68.96 90 bottom
C282  10uF  [0402-TIGHT]  159.39,66.55 0 bottom
C283  15pF  [0402-TIGHT]  155.32,53.09 0 top
C284  15pF  [0402-TIGHT]  152.65,55.12 0 top
C285  0.1uF  [0402-TIGHT]  152.53,57.15 270 top
C286  0.1uF  [0402-TIGHT]  155.32,54.1 180 top
C287  0.1uF  [0402-TIGHT]  156.46,63.63 180 top
C288  0.1uF  [0402-TIGHT]  161.29,53.59 270 top
C289  0.1uF  [0402-TIGHT]  152.53,62.1 90 top
C290  0.1uF  [0402-TIGHT]  162.81,62.23 90 top
C291  0.1uF  [0402-TIGHT]  157.99,53.59 270 top
C292  0.1uF  [0402-TIGHT]  152.53,59.18 270 top
C293  10uF  [0402-TIGHT]  161.42,65.79 270 top
C294  10uF  [0402-TIGHT]  159.51,63.75 0 top
C295  2.2uF  [0402-TIGHT]  161.8,63.25 270 top
C296  0.1uF  [0402-TIGHT]  159.64,68.71 0 top
C297  2.2uF  [0402-TIGHT]  159.39,65.28 180 bottom
C298  0.1uF  [0402-TIGHT]  162.43,59.44 90 top
C299  0.1uF  [0402-TIGHT]  162.43,57.4 270 top
C300  0.1uF  [0402-TIGHT]  154.94,69.09 0 bottom
C301  10uF  [0402-TIGHT]  179.71,68.96 90 bottom
C302  10uF  [0402-TIGHT]  182.25,66.55 0 bottom
C303  15pF  [0402-TIGHT]  178.18,53.09 0 top
C304  15pF  [0402-TIGHT]  175.51,55.12 0 top
C305  0.1uF  [0402-TIGHT]  175.39,57.15 270 top
C306  0.1uF  [0402-TIGHT]  178.18,54.1 180 top
C307  0.1uF  [0402-TIGHT]  179.32,63.63 180 top
C308  0.1uF  [0402-TIGHT]  184.15,53.59 270 top
C309  0.1uF  [0402-TIGHT]  175.39,62.1 90 top
C310  0.1uF  [0402-TIGHT]  185.67,62.23 90 top
C311  0.1uF  [0402-TIGHT]  180.85,53.59 270 top
C312  0.1uF  [0402-TIGHT]  175.39,59.18 270 top
C313  10uF  [0402-TIGHT]  184.28,65.79 270 top
C314  10uF  [0402-TIGHT]  182.37,63.75 0 top
C315  2.2uF  [0402-TIGHT]  184.66,63.25 270 top
C316  0.1uF  [0402-TIGHT]  182.5,68.71 0 top
C317  2.2uF  [0402-TIGHT]  182.25,65.28 180 bottom
C318  0.1uF  [0402-TIGHT]  185.29,59.44 90 top
C319  0.1uF  [0402-TIGHT]  185.29,57.4 270 top
C320  0.1uF  [0402-TIGHT]  177.8,69.09 0 bottom
C321  10uF  [0402-TIGHT]  19.69,108.33 90 bottom
C322  10uF  [0402-TIGHT]  22.23,105.92 0 bottom
C323  15pF  [0402-TIGHT]  18.16,92.46 0 top
C324  15pF  [0402-TIGHT]  15.49,94.49 0 top
C325  0.1uF  [0402-TIGHT]  15.37,96.52 270 top
C326  0.1uF  [0402-TIGHT]  18.16,93.47 180 top
C327  0.1uF  [0402-TIGHT]  19.3,103 180 top
C328  0.1uF  [0402-TIGHT]  24.13,92.96 270 top
C329  0.1uF  [0402-TIGHT]  15.37,101.47 90 top
C330  0.1uF  [0402-TIGHT]  25.65,101.6 90 top
C331  0.1uF  [0402-TIGHT]  20.83,92.96 270 top
C332  0.1uF  [0402-TIGHT]  15.37,98.55 270 top
C333  10uF  [0402-TIGHT]  24.26,105.16 270 top
C334  10uF  [0402-TIGHT]  22.35,103.12 0 top
C335  2.2uF  [0402-TIGHT]  24.64,102.62 270 top
C336  0.1uF  [0402-TIGHT]  22.48,108.08 0 top
C337  2.2uF  [0402-TIGHT]  22.23,104.65 180 bottom
C338  0.1uF  [0402-TIGHT]  25.27,98.81 90 top
C339  0.1uF  [0402-TIGHT]  25.27,96.77 270 top
C340  0.1uF  [0402-TIGHT]  17.78,108.46 0 bottom
C341  10uF  [0402-TIGHT]  42.55,108.33 90 bottom
C342  10uF  [0402-TIGHT]  45.09,105.92 0 bottom
C343  15pF  [0402-TIGHT]  41.02,92.46 0 top
C344  15pF  [0402-TIGHT]  38.35,94.49 0 top
C345  0.1uF  [0402-TIGHT]  38.23,96.52 270 top
C346  0.1uF  [0402-TIGHT]  41.02,93.47 180 top
C347  0.1uF  [0402-TIGHT]  42.16,103 180 top
C348  0.1uF  [0402-TIGHT]  46.99,92.96 270 top
C349  0.1uF  [0402-TIGHT]  38.23,101.47 90 top
C350  0.1uF  [0402-TIGHT]  48.51,101.6 90 top
C351  0.1uF  [0402-TIGHT]  43.69,92.96 270 top
C352  0.1uF  [0402-TIGHT]  38.23,98.55 270 top
C353  10uF  [0402-TIGHT]  47.12,105.16 270 top
C354  10uF  [0402-TIGHT]  45.21,103.12 0 top
C355  2.2uF  [0402-TIGHT]  47.5,102.62 270 top
C356  0.1uF  [0402-TIGHT]  45.34,108.08 0 top
C357  2.2uF  [0402-TIGHT]  45.09,104.65 180 bottom
C358  0.1uF  [0402-TIGHT]  48.13,98.81 90 top
C359  0.1uF  [0402-TIGHT]  48.13,96.77 270 top
C360  0.1uF  [0402-TIGHT]  40.64,108.46 0 bottom
C361  10uF  [0402-TIGHT]  65.41,108.33 90 bottom
C362  10uF  [0402-TIGHT]  67.94,105.92 0 bottom
C363  15pF  [0402-TIGHT]  63.88,92.46 0 top
C364  15pF  [0402-TIGHT]  61.21,94.49 0 top
C365  0.1uF  [0402-TIGHT]  61.09,96.52 270 top
C366  0.1uF  [0402-TIGHT]  63.88,93.47 180 top
C367  0.1uF  [0402-TIGHT]  65.02,103 180 top
C368  0.1uF  [0402-TIGHT]  69.85,92.96 270 top
C369  0.1uF  [0402-TIGHT]  61.09,101.47 90 top
C370  0.1uF  [0402-TIGHT]  71.37,101.6 90 top
C371  0.1uF  [0402-TIGHT]  66.55,92.96 270 top
C372  0.1uF  [0402-TIGHT]  61.09,98.55 270 top
C373  10uF  [0402-TIGHT]  69.98,105.16 270 top
C374  10uF  [0402-TIGHT]  68.07,103.12 0 top
C375  2.2uF  [0402-TIGHT]  70.36,102.62 270 top
C376  0.1uF  [0402-TIGHT]  68.2,108.08 0 top
C377  2.2uF  [0402-TIGHT]  67.94,104.65 180 bottom
C378  0.1uF  [0402-TIGHT]  70.99,98.81 90 top
C379  0.1uF  [0402-TIGHT]  70.99,96.77 270 top
C380  0.1uF  [0402-TIGHT]  63.5,108.46 0 bottom
C381  10uF  [0402-TIGHT]  88.26,108.33 90 bottom
C382  10uF  [0402-TIGHT]  90.81,105.92 0 bottom
C383  15pF  [0402-TIGHT]  86.74,92.46 0 top
C384  15pF  [0402-TIGHT]  84.07,94.49 0 top
C385  0.1uF  [0402-TIGHT]  83.95,96.52 270 top
C386  0.1uF  [0402-TIGHT]  86.74,93.47 180 top
C387  0.1uF  [0402-TIGHT]  87.88,103 180 top
C388  0.1uF  [0402-TIGHT]  92.71,92.96 270 top
C389  0.1uF  [0402-TIGHT]  83.95,101.47 90 top
C390  0.1uF  [0402-TIGHT]  94.23,101.6 90 top
C391  0.1uF  [0402-TIGHT]  89.41,92.96 270 top
C392  0.1uF  [0402-TIGHT]  83.95,98.55 270 top
C393  10uF  [0402-TIGHT]  92.84,105.16 270 top
C394  10uF  [0402-TIGHT]  90.93,103.12 0 top
C395  2.2uF  [0402-TIGHT]  93.22,102.62 270 top
C396  0.1uF  [0402-TIGHT]  91.06,108.08 0 top
C397  2.2uF  [0402-TIGHT]  90.81,104.65 180 bottom
C398  0.1uF  [0402-TIGHT]  93.85,98.81 90 top
C399  0.1uF  [0402-TIGHT]  93.85,96.77 270 top
C400  0.1uF  [0402-TIGHT]  86.36,108.46 0 bottom
C401  10uF  [0402-TIGHT]  111.12,108.33 90 bottom
C402  10uF  [0402-TIGHT]  113.66,105.92 0 bottom
C403  15pF  [0402-TIGHT]  109.6,92.46 0 top
C404  15pF  [0402-TIGHT]  106.93,94.49 0 top
C405  0.1uF  [0402-TIGHT]  106.81,96.52 270 top
C406  0.1uF  [0402-TIGHT]  109.6,93.47 180 top
C407  0.1uF  [0402-TIGHT]  110.74,103 180 top
C408  0.1uF  [0402-TIGHT]  115.57,92.96 270 top
C409  0.1uF  [0402-TIGHT]  106.81,101.47 90 top
C410  0.1uF  [0402-TIGHT]  117.09,101.6 90 top
C411  0.1uF  [0402-TIGHT]  112.27,92.96 270 top
C412  0.1uF  [0402-TIGHT]  106.81,98.55 270 top
C413  10uF  [0402-TIGHT]  115.7,105.16 270 top
C414  10uF  [0402-TIGHT]  113.79,103.12 0 top
C415  2.2uF  [0402-TIGHT]  116.08,102.62 270 top
C416  0.1uF  [0402-TIGHT]  113.92,108.08 0 top
C417  2.2uF  [0402-TIGHT]  113.66,104.65 180 bottom
C418  0.1uF  [0402-TIGHT]  116.71,98.81 90 top
C419  0.1uF  [0402-TIGHT]  116.71,96.77 270 top
C420  0.1uF  [0402-TIGHT]  109.22,108.46 0 bottom
C421  10uF  [0402-TIGHT]  133.99,108.33 90 bottom
C422  10uF  [0402-TIGHT]  136.53,105.92 0 bottom
C423  15pF  [0402-TIGHT]  132.46,92.46 0 top
C424  15pF  [0402-TIGHT]  129.79,94.49 0 top
C425  0.1uF  [0402-TIGHT]  129.67,96.52 270 top
C426  0.1uF  [0402-TIGHT]  132.46,93.47 180 top
C427  0.1uF  [0402-TIGHT]  133.6,103 180 top
C428  0.1uF  [0402-TIGHT]  138.43,92.96 270 top
C429  0.1uF  [0402-TIGHT]  129.67,101.47 90 top
C430  0.1uF  [0402-TIGHT]  139.95,101.6 90 top
C431  0.1uF  [0402-TIGHT]  135.13,92.96 270 top
C432  0.1uF  [0402-TIGHT]  129.67,98.55 270 top
C433  10uF  [0402-TIGHT]  138.56,105.16 270 top
C434  10uF  [0402-TIGHT]  136.65,103.12 0 top
C435  2.2uF  [0402-TIGHT]  138.94,102.62 270 top
C436  0.1uF  [0402-TIGHT]  136.78,108.08 0 top
C437  2.2uF  [0402-TIGHT]  136.53,104.65 180 bottom
C438  0.1uF  [0402-TIGHT]  139.57,98.81 90 top
C439  0.1uF  [0402-TIGHT]  139.57,96.77 270 top
C440  0.1uF  [0402-TIGHT]  132.08,108.46 0 bottom
C441  10uF  [0402-TIGHT]  156.84,108.33 90 bottom
C442  10uF  [0402-TIGHT]  159.39,105.92 0 bottom
C443  15pF  [0402-TIGHT]  155.32,92.46 0 top
C444  15pF  [0402-TIGHT]  152.65,94.49 0 top
C445  0.1uF  [0402-TIGHT]  152.53,96.52 270 top
C446  0.1uF  [0402-TIGHT]  155.32,93.47 180 top
C447  0.1uF  [0402-TIGHT]  156.46,103 180 top
C448  0.1uF  [0402-TIGHT]  161.29,92.96 270 top
C449  0.1uF  [0402-TIGHT]  152.53,101.47 90 top
C450  0.1uF  [0402-TIGHT]  162.81,101.6 90 top
C451  0.1uF  [0402-TIGHT]  157.99,92.96 270 top
C452  0.1uF  [0402-TIGHT]  152.53,98.55 270 top
C453  10uF  [0402-TIGHT]  161.42,105.16 270 top
C454  10uF  [0402-TIGHT]  159.51,103.12 0 top
C455  2.2uF  [0402-TIGHT]  161.8,102.62 270 top
C456  0.1uF  [0402-TIGHT]  159.64,108.08 0 top
C457  2.2uF  [0402-TIGHT]  159.39,104.65 180 bottom
C458  0.1uF  [0402-TIGHT]  162.43,98.81 90 top
C459  0.1uF  [0402-TIGHT]  162.43,96.77 270 top
C460  0.1uF  [0402-TIGHT]  154.94,108.46 0 bottom
C461  10uF  [0402-TIGHT]  179.71,108.33 90 bottom
C462  10uF  [0402-TIGHT]  182.25,105.92 0 bottom
C463  15pF  [0402-TIGHT]  178.18,92.46 0 top
C464  15pF  [0402-TIGHT]  175.51,94.49 0 top
C465  0.1uF  [0402-TIGHT]  175.39,96.52 270 top
C466  0.1uF  [0402-TIGHT]  178.18,93.47 180 top
C467  0.1uF  [0402-TIGHT]  179.32,103 180 top
C468  0.1uF  [0402-TIGHT]  184.15,92.96 270 top
C469  0.1uF  [0402-TIGHT]  175.39,101.47 90 top
C470  0.1uF  [0402-TIGHT]  185.67,101.6 90 top
C471  0.1uF  [0402-TIGHT]  180.85,92.96 270 top
C472  0.1uF  [0402-TIGHT]  175.39,98.55 270 top
C473  10uF  [0402-TIGHT]  184.28,105.16 270 top
C474  10uF  [0402-TIGHT]  182.37,103.12 0 top
C475  2.2uF  [0402-TIGHT]  184.66,102.62 270 top
C476  0.1uF  [0402-TIGHT]  182.5,108.08 0 top
C477  2.2uF  [0402-TIGHT]  182.25,104.65 180 bottom
C478  0.1uF  [0402-TIGHT]  185.29,98.81 90 top
C479  0.1uF  [0402-TIGHT]  185.29,96.77 270 top
C480  0.1uF  [0402-TIGHT]  177.8,108.46 0 bottom
D1  3A/10V/280mV  [SOD-323]  41.4,31.5 0 bottom
D2  3A/10V/280mV  [SOD-323]  18.54,31.5 0 bottom
D3  3A/10V/280mV  [SOD-323]  64.26,31.5 0 bottom
D4  3A/10V/280mV  [SOD-323]  87.12,31.5 0 bottom
D5  3A/10V/280mV  [SOD-323]  109.98,31.5 0 bottom
D6  3A/10V/280mV  [SOD-323]  132.84,31.5 0 bottom
D7  3A/10V/280mV  [SOD-323]  155.7,31.5 0 bottom
D8  3A/10V/280mV  [SOD-323]  178.56,31.5 0 bottom
D9  3A/10V/280mV  [SOD-323]  18.54,70.87 0 bottom
D10  3A/10V/280mV  [SOD-323]  41.4,70.87 0 bottom
D11  3A/10V/280mV  [SOD-323]  64.26,70.87 0 bottom
D12  3A/10V/280mV  [SOD-323]  87.12,70.87 0 bottom
D13  3A/10V/280mV  [SOD-323]  109.98,70.87 0 bottom
D14  3A/10V/280mV  [SOD-323]  132.84,70.87 0 bottom
D15  3A/10V/280mV  [SOD-323]  155.7,70.87 0 bottom
D16  3A/10V/280mV  [SOD-323]  178.56,70.87 0 bottom
D17  3A/10V/280mV  [SOD-323]  18.54,110.24 0 bottom
D18  3A/10V/280mV  [SOD-323]  41.4,110.24 0 bottom
D19  3A/10V/280mV  [SOD-323]  64.26,110.24 0 bottom
D20  3A/10V/280mV  [SOD-323]  87.12,110.24 0 bottom
D21  3A/10V/280mV  [SOD-323]  109.98,110.24 0 bottom
D22  3A/10V/280mV  [SOD-323]  132.84,110.24 0 bottom
D23  3A/10V/280mV  [SOD-323]  155.7,110.24 0 bottom
D24  3A/10V/280mV  [SOD-323]  178.56,110.24 0 bottom
E$1  [FIDUCIAL-1X2]  4.23,115.95 0 top
E$2  [FIDUCIAL-1X2]  4.23,115.95 0 bottom
E$3  [FIDUCIAL-1X2]  196.43,115.95 0 top
E$4  [FIDUCIAL-1X2]  196.43,115.95 0 bottom
E$5  [FIDUCIAL-1.5X3]  4.23,13.21 0 top
E$6  [FIDUCIAL-1.5X3]  4.23,13.21 0 bottom
F1  6V 0.5A  [0805]  15.88,31.62 270 bottom
F2  6V 0.5A  [0805]  38.73,31.62 270 bottom
F3  6V 0.5A  [0805]  61.59,31.62 270 bottom
F4  6V 0.5A  [0805]  84.46,31.62 270 bottom
F5  6V 0.5A  [0805]  107.31,31.62 270 bottom
F6  6V 0.5A  [0805]  130.18,31.62 270 bottom
F7  6V 0.5A  [0805]  153.03,31.62 270 bottom
F8  6V 0.5A  [0805]  175.9,31.62 270 bottom
F9  6V 0.5A  [0805]  15.88,70.99 270 bottom
F10  6V 0.5A  [0805]  38.73,70.99 270 bottom
F11  6V 0.5A  [0805]  61.59,70.99 270 bottom
F12  6V 0.5A  [0805]  84.46,70.99 270 bottom
F13  6V 0.5A  [0805]  107.31,70.99 270 bottom
F14  6V 0.5A  [0805]  130.18,70.99 270 bottom
F15  6V 0.5A  [0805]  153.03,70.99 270 bottom
F16  6V 0.5A  [0805]  175.9,70.99 270 bottom
F17  6V 0.5A  [0805]  15.88,110.36 270 bottom
F18  6V 0.5A  [0805]  38.73,110.36 270 bottom
F19  6V 0.5A  [0805]  61.59,110.36 270 bottom
F20  6V 0.5A  [0805]  84.46,110.36 270 bottom
F21  6V 0.5A  [0805]  107.31,110.36 270 bottom
F22  6V 0.5A  [0805]  130.18,110.36 270 bottom
F23  6V 0.5A  [0805]  153.03,110.36 270 bottom
F24  6V 0.5A  [0805]  175.9,110.36 270 bottom
J1  QWIIC_RIGHT_ANGLE  [JST04_1MM_RA]  43.18,11.94 0 top
J2  QWIIC_RIGHT_ANGLE  [JST04_1MM_RA]  20.32,11.94 0 top
J3  [1X12_CASTELLATED]  12.7,8.13 0 top
J4  [1X12_CASTELLATED]  27.94,36.07 180 top
J5  USB Female Type C Connector  [USB-C-16P_4LAYER-PADS]  20.32,33.53 180 top
J6  [1X12_CASTELLATED]  35.56,8.13 0 top
J7  [1X12_CASTELLATED]  50.8,36.07 180 top
J8  USB Female Type C Connector  [USB-C-16P_4LAYER-PADS]  43.18,33.53 180 top
J9  QWIIC_RIGHT_ANGLE  [JST04_1MM_RA]  66.04,11.94 0 top
J10  [1X12_CASTELLATED]  58.42,8.13 0 top
J11  [1X12_CASTELLATED]  73.66,36.07 180 top
J12  USB Female Type C Connector  [USB-C-16P_4LAYER-PADS]  66.04,33.53 180 top
J13  QWIIC_RIGHT_ANGLE  [JST04_1MM_RA]  88.9,11.94 0 top
J14  [1X12_CASTELLATED]  81.28,8.13 0 top
J15  [1X12_CASTELLATED]  96.52,36.07 180 top
J16  USB Female Type C Connector  [USB-C-16P_4LAYER-PADS]  88.9,33.53 180 top
J17  QWIIC_RIGHT_ANGLE  [JST04_1MM_RA]  111.76,11.94 0 top
J18  [1X12_CASTELLATED]  104.14,8.13 0 top
J19  [1X12_CASTELLATED]  119.38,36.07 180 top
J20  USB Female Type C Connector  [USB-C-16P_4LAYER-PADS]  111.76,33.53 180 top
J21  QWIIC_RIGHT_ANGLE  [JST04_1MM_RA]  134.62,11.94 0 top
J22  [1X12_CASTELLATED]  127,8.13 0 top
J23  [1X12_CASTELLATED]  142.24,36.07 180 top
J24  USB Female Type C Connector  [USB-C-16P_4LAYER-PADS]  134.62,33.53 180 top
J25  QWIIC_RIGHT_ANGLE  [JST04_1MM_RA]  157.48,11.94 0 top
J26  [1X12_CASTELLATED]  149.86,8.13 0 top
J27  [1X12_CASTELLATED]  165.1,36.07 180 top
J28  USB Female Type C Connector  [USB-C-16P_4LAYER-PADS]  157.48,33.53 180 top
J29  QWIIC_RIGHT_ANGLE  [JST04_1MM_RA]  180.34,11.94 0 top
J30  [1X12_CASTELLATED]  172.72,8.13 0 top
J31  [1X12_CASTELLATED]  187.96,36.07 180 top
J32  USB Female Type C Connector  [USB-C-16P_4LAYER-PADS]  180.34,33.53 180 top
J33  QWIIC_RIGHT_ANGLE  [JST04_1MM_RA]  20.32,51.31 0 top
J34  [1X12_CASTELLATED]  12.7,47.5 0 top
J35  [1X12_CASTELLATED]  27.94,75.44 180 top
J36  USB Female Type C Connector  [USB-C-16P_4LAYER-PADS]  20.32,72.9 180 top
J37  QWIIC_RIGHT_ANGLE  [JST04_1MM_RA]  43.18,51.31 0 top
J38  [1X12_CASTELLATED]  35.56,47.5 0 top
J39  [1X12_CASTELLATED]  50.8,75.44 180 top
J40  USB Female Type C Connector  [USB-C-16P_4LAYER-PADS]  43.18,72.9 180 top
J41  QWIIC_RIGHT_ANGLE  [JST04_1MM_RA]  66.04,51.31 0 top
J42  [1X12_CASTELLATED]  58.42,47.5 0 top
J43  [1X12_CASTELLATED]  73.66,75.44 180 top
J44  USB Female Type C Connector  [USB-C-16P_4LAYER-PADS]  66.04,72.9 180 top
J45  QWIIC_RIGHT_ANGLE  [JST04_1MM_RA]  88.9,51.31 0 top
J46  [1X12_CASTELLATED]  81.28,47.5 0 top
J47  [1X12_CASTELLATED]  96.52,75.44 180 top
J48  USB Female Type C Connector  [USB-C-16P_4LAYER-PADS]  88.9,72.9 180 top
J49  QWIIC_RIGHT_ANGLE  [JST04_1MM_RA]  111.76,51.31 0 top
J50  [1X12_CASTELLATED]  104.14,47.5 0 top
J51  [1X12_CASTELLATED]  119.38,75.44 180 top
J52  USB Female Type C Connector  [USB-C-16P_4LAYER-PADS]  111.76,72.9 180 top
J53  QWIIC_RIGHT_ANGLE  [JST04_1MM_RA]  134.62,51.31 0 top
J54  [1X12_CASTELLATED]  127,47.5 0 top
J55  [1X12_CASTELLATED]  142.24,75.44 180 top
J56  USB Female Type C Connector  [USB-C-16P_4LAYER-PADS]  134.62,72.9 180 top
J57  QWIIC_RIGHT_ANGLE  [JST04_1MM_RA]  157.48,51.31 0 top
J58  [1X12_CASTELLATED]  149.86,47.5 0 top
J59  [1X12_CASTELLATED]  165.1,75.44 180 top
J60  USB Female Type C Connector  [USB-C-16P_4LAYER-PADS]  157.48,72.9 180 top
J61  QWIIC_RIGHT_ANGLE  [JST04_1MM_RA]  180.34,51.31 0 top
J62  [1X12_CASTELLATED]  172.72,47.5 0 top
J63  [1X12_CASTELLATED]  187.96,75.44 180 top
J64  USB Female Type C Connector  [USB-C-16P_4LAYER-PADS]  180.34,72.9 180 top
J65  QWIIC_RIGHT_ANGLE  [JST04_1MM_RA]  20.32,90.68 0 top
J66  [1X12_CASTELLATED]  12.7,86.87 0 top
J67  [1X12_CASTELLATED]  27.94,114.81 180 top
J68  USB Female Type C Connector  [USB-C-16P_4LAYER-PADS]  20.32,112.27 180 top
J69  QWIIC_RIGHT_ANGLE  [JST04_1MM_RA]  43.18,90.68 0 top
J70  [1X12_CASTELLATED]  35.56,86.87 0 top
J71  [1X12_CASTELLATED]  50.8,114.81 180 top
J72  USB Female Type C Connector  [USB-C-16P_4LAYER-PADS]  43.18,112.27 180 top
J73  QWIIC_RIGHT_ANGLE  [JST04_1MM_RA]  66.04,90.68 0 top
J74  [1X12_CASTELLATED]  58.42,86.87 0 top
J75  [1X12_CASTELLATED]  73.66,114.81 180 top
J76  USB Female Type C Connector  [USB-C-16P_4LAYER-PADS]  66.04,112.27 180 top
J77  QWIIC_RIGHT_ANGLE  [JST04_1MM_RA]  88.9,90.68 0 top
J78  [1X12_CASTELLATED]  81.28,86.87 0 top
J79  [1X12_CASTELLATED]  96.52,114.81 180 top
J80  USB Female Type C Connector  [USB-C-16P_4LAYER-PADS]  88.9,112.27 180 top
J81  QWIIC_RIGHT_ANGLE  [JST04_1MM_RA]  111.76,90.68 0 top
J82  [1X12_CASTELLATED]  104.14,86.87 0 top
J83  [1X12_CASTELLATED]  119.38,114.81 180 top
J84  USB Female Type C Connector  [USB-C-16P_4LAYER-PADS]  111.76,112.27 180 top
J85  QWIIC_RIGHT_ANGLE  [JST04_1MM_RA]  134.62,90.68 0 top
J86  [1X12_CASTELLATED]  127,86.87 0 top
J87  [1X12_CASTELLATED]  142.24,114.81 180 top
J88  USB Female Type C Connector  [USB-C-16P_4LAYER-PADS]  134.62,112.27 180 top
J89  QWIIC_RIGHT_ANGLE  [JST04_1MM_RA]  157.48,90.68 0 top
J90  [1X12_CASTELLATED]  149.86,86.87 0 top
J91  [1X12_CASTELLATED]  165.1,114.81 180 top
J92  USB Female Type C Connector  [USB-C-16P_4LAYER-PADS]  157.48,112.27 180 top
J93  QWIIC_RIGHT_ANGLE  [JST04_1MM_RA]  180.34,90.68 0 top
J94  [1X12_CASTELLATED]  172.72,86.87 0 top
J95  [1X12_CASTELLATED]  187.96,114.81 180 top
J96  USB Female Type C Connector  [USB-C-16P_4LAYER-PADS]  180.34,112.27 180 top
JP1  FIDUCIAL1X2  [FIDUCIAL-1X2]  26.04,8.76 0 top
JP2  FIDUCIAL1X2  [FIDUCIAL-1X2]  17.78,38.61 0 top
JP3  FIDUCIAL1X2  [FIDUCIAL-1X2]  25.4,37.08 0 bottom
JP4  FIDUCIAL1X2  [FIDUCIAL-1X2]  13.97,9.4 180 bottom
JP5  FIDUCIAL1X2  [FIDUCIAL-1X2]  48.9,8.76 0 top
JP6  FIDUCIAL1X2  [FIDUCIAL-1X2]  40.64,38.61 0 top
JP7  USB_SOLDER_PADS  [USB-SOLDER-PADS]  43.18,38.23 90 bottom
JP8  FIDUCIAL1X2  [FIDUCIAL-1X2]  48.26,37.08 0 bottom
JP9  FIDUCIAL1X2  [FIDUCIAL-1X2]  36.83,9.4 180 bottom
JP10  FIDUCIAL1X2  [FIDUCIAL-1X2]  71.75,8.76 0 top
JP11  FIDUCIAL1X2  [FIDUCIAL-1X2]  63.5,38.61 0 top
JP12  USB_SOLDER_PADS  [USB-SOLDER-PADS]  66.04,38.23 90 bottom
JP13  FIDUCIAL1X2  [FIDUCIAL-1X2]  71.12,37.08 0 bottom
JP14  USB_SOLDER_PADS  [USB-SOLDER-PADS]  20.32,38.23 90 bottom
JP15  FIDUCIAL1X2  [FIDUCIAL-1X2]  59.69,9.4 180 bottom
JP16  FIDUCIAL1X2  [FIDUCIAL-1X2]  94.62,8.76 0 top
JP17  FIDUCIAL1X2  [FIDUCIAL-1X2]  86.36,38.61 0 top
JP18  USB_SOLDER_PADS  [USB-SOLDER-PADS]  88.9,38.23 90 bottom
JP19  FIDUCIAL1X2  [FIDUCIAL-1X2]  93.98,37.08 0 bottom
JP20  FIDUCIAL1X2  [FIDUCIAL-1X2]  82.55,9.4 180 bottom
JP21  FIDUCIAL1X2  [FIDUCIAL-1X2]  117.47,8.76 0 top
JP22  FIDUCIAL1X2  [FIDUCIAL-1X2]  109.22,38.61 0 top
JP23  USB_SOLDER_PADS  [USB-SOLDER-PADS]  111.76,38.23 90 bottom
JP24  FIDUCIAL1X2  [FIDUCIAL-1X2]  116.84,37.08 0 bottom
JP25  FIDUCIAL1X2  [FIDUCIAL-1X2]  105.41,9.4 180 bottom
JP26  FIDUCIAL1X2  [FIDUCIAL-1X2]  140.34,8.76 0 top
JP27  FIDUCIAL1X2  [FIDUCIAL-1X2]  132.08,38.61 0 top
JP28  USB_SOLDER_PADS  [USB-SOLDER-PADS]  134.62,38.23 90 bottom
JP29  FIDUCIAL1X2  [FIDUCIAL-1X2]  139.7,37.08 0 bottom
JP30  FIDUCIAL1X2  [FIDUCIAL-1X2]  128.27,9.4 180 bottom
JP31  FIDUCIAL1X2  [FIDUCIAL-1X2]  163.19,8.76 0 top
JP32  FIDUCIAL1X2  [FIDUCIAL-1X2]  154.94,38.61 0 top
JP33  USB_SOLDER_PADS  [USB-SOLDER-PADS]  157.48,38.23 90 bottom
JP34  FIDUCIAL1X2  [FIDUCIAL-1X2]  162.56,37.08 0 bottom
JP35  FIDUCIAL1X2  [FIDUCIAL-1X2]  151.13,9.4 180 bottom
JP36  FIDUCIAL1X2  [FIDUCIAL-1X2]  186.06,8.76 0 top
JP37  FIDUCIAL1X2  [FIDUCIAL-1X2]  177.8,38.61 0 top
JP38  USB_SOLDER_PADS  [USB-SOLDER-PADS]  180.34,38.23 90 bottom
JP39  FIDUCIAL1X2  [FIDUCIAL-1X2]  185.42,37.08 0 bottom
JP40  FIDUCIAL1X2  [FIDUCIAL-1X2]  173.99,9.4 180 bottom
JP41  FIDUCIAL1X2  [FIDUCIAL-1X2]  26.04,48.13 0 top
JP42  FIDUCIAL1X2  [FIDUCIAL-1X2]  17.78,77.98 0 top
JP43  USB_SOLDER_PADS  [USB-SOLDER-PADS]  20.32,77.6 90 bottom
JP44  FIDUCIAL1X2  [FIDUCIAL-1X2]  25.4,76.45 0 bottom
JP45  FIDUCIAL1X2  [FIDUCIAL-1X2]  13.97,48.77 180 bottom
JP46  FIDUCIAL1X2  [FIDUCIAL-1X2]  48.9,48.13 0 top
JP47  FIDUCIAL1X2  [FIDUCIAL-1X2]  40.64,77.98 0 top
JP48  USB_SOLDER_PADS  [USB-SOLDER-PADS]  43.18,77.6 90 bottom
JP49  FIDUCIAL1X2  [FIDUCIAL-1X2]  48.26,76.45 0 bottom
JP50  FIDUCIAL1X2  [FIDUCIAL-1X2]  36.83,48.77 180 bottom
JP51  FIDUCIAL1X2  [FIDUCIAL-1X2]  71.75,48.13 0 top
JP52  FIDUCIAL1X2  [FIDUCIAL-1X2]  63.5,77.98 0 top
JP53  USB_SOLDER_PADS  [USB-SOLDER-PADS]  66.04,77.6 90 bottom
JP54  FIDUCIAL1X2  [FIDUCIAL-1X2]  71.12,76.45 0 bottom
JP55  FIDUCIAL1X2  [FIDUCIAL-1X2]  59.69,48.77 180 bottom
JP56  FIDUCIAL1X2  [FIDUCIAL-1X2]  94.62,48.13 0 top
JP57  FIDUCIAL1X2  [FIDUCIAL-1X2]  86.36,77.98 0 top
JP58  USB_SOLDER_PADS  [USB-SOLDER-PADS]  88.9,77.6 90 bottom
JP59  FIDUCIAL1X2  [FIDUCIAL-1X2]  93.98,76.45 0 bottom
JP60  FIDUCIAL1X2  [FIDUCIAL-1X2]  82.55,48.77 180 bottom
JP61  FIDUCIAL1X2  [FIDUCIAL-1X2]  117.47,48.13 0 top
JP62  FIDUCIAL1X2  [FIDUCIAL-1X2]  109.22,77.98 0 top
JP63  USB_SOLDER_PADS  [USB-SOLDER-PADS]  111.76,77.6 90 bottom
JP64  FIDUCIAL1X2  [FIDUCIAL-1X2]  116.84,76.45 0 bottom
JP65  FIDUCIAL1X2  [FIDUCIAL-1X2]  105.41,48.77 180 bottom
JP66  FIDUCIAL1X2  [FIDUCIAL-1X2]  140.34,48.13 0 top
JP67  FIDUCIAL1X2  [FIDUCIAL-1X2]  132.08,77.98 0 top
JP68  USB_SOLDER_PADS  [USB-SOLDER-PADS]  134.62,77.6 90 bottom
JP69  FIDUCIAL1X2  [FIDUCIAL-1X2]  139.7,76.45 0 bottom
JP70  FIDUCIAL1X2  [FIDUCIAL-1X2]  128.27,48.77 180 bottom
JP71  FIDUCIAL1X2  [FIDUCIAL-1X2]  163.19,48.13 0 top
JP72  FIDUCIAL1X2  [FIDUCIAL-1X2]  154.94,77.98 0 top
JP73  USB_SOLDER_PADS  [USB-SOLDER-PADS]  157.48,77.6 90 bottom
JP74  FIDUCIAL1X2  [FIDUCIAL-1X2]  162.56,76.45 0 bottom
JP75  FIDUCIAL1X2  [FIDUCIAL-1X2]  151.13,48.77 180 bottom
JP76  FIDUCIAL1X2  [FIDUCIAL-1X2]  186.06,48.13 0 top
JP77  FIDUCIAL1X2  [FIDUCIAL-1X2]  177.8,77.98 0 top
JP78  USB_SOLDER_PADS  [USB-SOLDER-PADS]  180.34,77.6 90 bottom
JP79  FIDUCIAL1X2  [FIDUCIAL-1X2]  185.42,76.45 0 bottom
JP80  FIDUCIAL1X2  [FIDUCIAL-1X2]  173.99,48.77 180 bottom
JP81  FIDUCIAL1X2  [FIDUCIAL-1X2]  26.04,87.5 0 top
JP82  FIDUCIAL1X2  [FIDUCIAL-1X2]  17.78,117.35 0 top
JP83  USB_SOLDER_PADS  [USB-SOLDER-PADS]  20.32,116.97 90 bottom
JP84  FIDUCIAL1X2  [FIDUCIAL-1X2]  25.4,115.82 0 bottom
JP85  FIDUCIAL1X2  [FIDUCIAL-1X2]  13.97,88.14 180 bottom
JP86  FIDUCIAL1X2  [FIDUCIAL-1X2]  48.9,87.5 0 top
JP87  FIDUCIAL1X2  [FIDUCIAL-1X2]  40.64,117.35 0 top
JP88  USB_SOLDER_PADS  [USB-SOLDER-PADS]  43.18,116.97 90 bottom
JP89  FIDUCIAL1X2  [FIDUCIAL-1X2]  48.26,115.82 0 bottom
JP90  FIDUCIAL1X2  [FIDUCIAL-1X2]  36.83,88.14 180 bottom
JP91  FIDUCIAL1X2  [FIDUCIAL-1X2]  71.75,87.5 0 top
JP92  FIDUCIAL1X2  [FIDUCIAL-1X2]  63.5,117.35 0 top
JP93  USB_SOLDER_PADS  [USB-SOLDER-PADS]  66.04,116.97 90 bottom
JP94  FIDUCIAL1X2  [FIDUCIAL-1X2]  71.12,115.82 0 bottom
JP95  FIDUCIAL1X2  [FIDUCIAL-1X2]  59.69,88.14 180 bottom
JP96  FIDUCIAL1X2  [FIDUCIAL-1X2]  94.62,87.5 0 top
JP97  FIDUCIAL1X2  [FIDUCIAL-1X2]  86.36,117.35 0 top
JP98  USB_SOLDER_PADS  [USB-SOLDER-PADS]  88.9,116.97 90 bottom
JP99  FIDUCIAL1X2  [FIDUCIAL-1X2]  93.98,115.82 0 bottom
JP100  FIDUCIAL1X2  [FIDUCIAL-1X2]  82.55,88.14 180 bottom
JP101  FIDUCIAL1X2  [FIDUCIAL-1X2]  117.47,87.5 0 top
JP102  FIDUCIAL1X2  [FIDUCIAL-1X2]  109.22,117.35 0 top
JP103  USB_SOLDER_PADS  [USB-SOLDER-PADS]  111.76,116.97 90 bottom
JP104  FIDUCIAL1X2  [FIDUCIAL-1X2]  116.84,115.82 0 bottom
JP105  FIDUCIAL1X2  [FIDUCIAL-1X2]  105.41,88.14 180 bottom
JP106  FIDUCIAL1X2  [FIDUCIAL-1X2]  140.34,87.5 0 top
JP107  FIDUCIAL1X2  [FIDUCIAL-1X2]  132.08,117.35 0 top
JP108  USB_SOLDER_PADS  [USB-SOLDER-PADS]  134.62,116.97 90 bottom
JP109  FIDUCIAL1X2  [FIDUCIAL-1X2]  139.7,115.82 0 bottom
JP110  FIDUCIAL1X2  [FIDUCIAL-1X2]  128.27,88.14 180 bottom
JP111  FIDUCIAL1X2  [FIDUCIAL-1X2]  163.19,87.5 0 top
JP112  FIDUCIAL1X2  [FIDUCIAL-1X2]  154.94,117.35 0 top
JP113  USB_SOLDER_PADS  [USB-SOLDER-PADS]  157.48,116.97 90 bottom
JP114  FIDUCIAL1X2  [FIDUCIAL-1X2]  162.56,115.82 0 bottom
JP115  FIDUCIAL1X2  [FIDUCIAL-1X2]  151.13,88.14 180 bottom
JP116  FIDUCIAL1X2  [FIDUCIAL-1X2]  186.06,87.5 0 top
JP117  FIDUCIAL1X2  [FIDUCIAL-1X2]  177.8,117.35 0 top
JP118  USB_SOLDER_PADS  [USB-SOLDER-PADS]  180.34,116.97 90 bottom
JP119  FIDUCIAL1X2  [FIDUCIAL-1X2]  185.42,115.82 0 bottom
JP120  FIDUCIAL1X2  [FIDUCIAL-1X2]  173.99,88.14 180 bottom
L1  4.7μH  [1008(2520)]  22.61,26.42 270 top
L2  4.7μH  [1008(2520)]  45.47,26.42 270 top
L3  4.7μH  [1008(2520)]  68.33,26.42 270 top
L4  4.7μH  [1008(2520)]  91.19,26.42 270 top
L5  4.7μH  [1008(2520)]  114.05,26.42 270 top
L6  4.7μH  [1008(2520)]  136.91,26.42 270 top
L7  4.7μH  [1008(2520)]  159.77,26.42 270 top
L8  4.7μH  [1008(2520)]  182.63,26.42 270 top
L9  4.7μH  [1008(2520)]  22.61,65.79 270 top
L10  4.7μH  [1008(2520)]  45.47,65.79 270 top
L11  4.7μH  [1008(2520)]  68.33,65.79 270 top
L12  4.7μH  [1008(2520)]  91.19,65.79 270 top
L13  4.7μH  [1008(2520)]  114.05,65.79 270 top
L14  4.7μH  [1008(2520)]  136.91,65.79 270 top
L15  4.7μH  [1008(2520)]  159.77,65.79 270 top
L16  4.7μH  [1008(2520)]  182.63,65.79 270 top
L17  4.7μH  [1008(2520)]  22.61,105.16 270 top
L18  4.7μH  [1008(2520)]  45.47,105.16 270 top
L19  4.7μH  [1008(2520)]  68.33,105.16 270 top
L20  4.7μH  [1008(2520)]  91.19,105.16 270 top
L21  4.7μH  [1008(2520)]  114.05,105.16 270 top
L22  4.7μH  [1008(2520)]  136.91,105.16 270 top
L23  4.7μH  [1008(2520)]  159.77,105.16 270 top
L24  4.7μH  [1008(2520)]  182.63,105.16 270 top
LED1  Red  [LED-0603]  13.33,38.1 0 top
LED2  Red  [LED-0603]  36.2,38.1 0 top
LED3  Red  [LED-0603]  59.05,38.1 0 top
LED4  Red  [LED-0603]  81.91,38.1 0 top
LED5  Red  [LED-0603]  104.78,38.1 0 top
LED6  Red  [LED-0603]  127.63,38.1 0 top
LED7  Red  [LED-0603]  150.5,38.1 0 top
LED8  Red  [LED-0603]  173.36,38.1 0 top
LED9  Red  [LED-0603]  13.33,77.47 0 top
LED10  Red  [LED-0603]  36.2,77.47 0 top
LED11  Red  [LED-0603]  59.05,77.47 0 top
LED12  Red  [LED-0603]  81.91,77.47 0 top
LED13  Red  [LED-0603]  104.78,77.47 0 top
LED14  Red  [LED-0603]  127.63,77.47 0 top
LED15  Red  [LED-0603]  150.5,77.47 0 top
LED16  Red  [LED-0603]  173.36,77.47 0 top
LED17  Red  [LED-0603]  13.33,116.84 0 top
LED18  Red  [LED-0603]  36.2,116.84 0 top
LED19  Red  [LED-0603]  59.05,116.84 0 top
LED20  Red  [LED-0603]  81.91,116.84 0 top
LED21  Red  [LED-0603]  104.78,116.84 0 top
LED22  Red  [LED-0603]  127.63,116.84 0 top
LED23  Red  [LED-0603]  150.5,116.84 0 top
LED24  Red  [LED-0603]  173.36,116.84 0 top
LOGO1  SFE_LOGO_NAME_FLAME.1_INCH  [SFE_LOGO_NAME_FLAME_.1]  20.32,20.83 270 bottom
LOGO2  SFE_LOGO_NAME_FLAME.1_INCH  [SFE_LOGO_NAME_FLAME_.1]  43.18,20.83 270 bottom
LOGO3  QWIIC_LOGO_6MM  [QWIIC_6MM]  20.32,11.3 0 bottom
LOGO4  SFE_LOGO_FLAME.1_INCH  [SFE_LOGO_FLAME_.1]  24.77,28.83 0 top
LOGO5  QWIIC_LOGO_6MM  [QWIIC_6MM]  43.18,11.3 0 bottom
LOGO6  SFE_LOGO_FLAME.1_INCH  [SFE_LOGO_FLAME_.1]  47.62,28.83 0 top
LOGO7  SFE_LOGO_NAME_FLAME.1_INCH  [SFE_LOGO_NAME_FLAME_.1]  66.04,20.83 270 bottom
LOGO8  QWIIC_LOGO_6MM  [QWIIC_6MM]  66.04,11.3 0 bottom
LOGO9  SFE_LOGO_FLAME.1_INCH  [SFE_LOGO_FLAME_.1]  70.48,28.83 0 top
LOGO10  SFE_LOGO_NAME_FLAME.1_INCH  [SFE_LOGO_NAME_FLAME_.1]  88.9,20.83 270 bottom
LOGO11  QWIIC_LOGO_6MM  [QWIIC_6MM]  88.9,11.3 0 bottom
LOGO12  SFE_LOGO_FLAME.1_INCH  [SFE_LOGO_FLAME_.1]  93.34,28.83 0 top
LOGO13  SFE_LOGO_NAME_FLAME.1_INCH  [SFE_LOGO_NAME_FLAME_.1]  111.76,20.83 270 bottom
LOGO14  QWIIC_LOGO_6MM  [QWIIC_6MM]  111.76,11.3 0 bottom
LOGO15  SFE_LOGO_FLAME.1_INCH  [SFE_LOGO_FLAME_.1]  116.21,28.83 0 top
LOGO16  SFE_LOGO_NAME_FLAME.1_INCH  [SFE_LOGO_NAME_FLAME_.1]  134.62,20.83 270 bottom
LOGO17  QWIIC_LOGO_6MM  [QWIIC_6MM]  134.62,11.3 0 bottom
LOGO18  SFE_LOGO_FLAME.1_INCH  [SFE_LOGO_FLAME_.1]  139.06,28.83 0 top
LOGO19  SFE_LOGO_NAME_FLAME.1_INCH  [SFE_LOGO_NAME_FLAME_.1]  157.48,20.83 270 bottom
LOGO20  QWIIC_LOGO_6MM  [QWIIC_6MM]  157.48,11.3 0 bottom
LOGO21  SFE_LOGO_FLAME.1_INCH  [SFE_LOGO_FLAME_.1]  161.93,28.83 0 top
LOGO22  SFE_LOGO_NAME_FLAME.1_INCH  [SFE_LOGO_NAME_FLAME_.1]  180.34,20.83 270 bottom
LOGO23  QWIIC_LOGO_6MM  [QWIIC_6MM]  180.34,11.3 0 bottom
LOGO24  SFE_LOGO_FLAME.1_INCH  [SFE_LOGO_FLAME_.1]  184.78,28.83 0 top
LOGO25  SFE_LOGO_NAME_FLAME.1_INCH  [SFE_LOGO_NAME_FLAME_.1]  20.32,60.2 270 bottom
LOGO26  QWIIC_LOGO_6MM  [QWIIC_6MM]  20.32,50.67 0 bottom
LOGO27  SFE_LOGO_FLAME.1_INCH  [SFE_LOGO_FLAME_.1]  24.77,68.2 0 top
LOGO28  SFE_LOGO_NAME_FLAME.1_INCH  [SFE_LOGO_NAME_FLAME_.1]  43.18,60.2 270 bottom
LOGO29  QWIIC_LOGO_6MM  [QWIIC_6MM]  43.18,50.67 0 bottom
LOGO30  SFE_LOGO_FLAME.1_INCH  [SFE_LOGO_FLAME_.1]  47.62,68.2 0 top
LOGO31  SFE_LOGO_NAME_FLAME.1_INCH  [SFE_LOGO_NAME_FLAME_.1]  66.04,60.2 270 bottom
LOGO32  QWIIC_LOGO_6MM  [QWIIC_6MM]  66.04,50.67 0 bottom
LOGO33  SFE_LOGO_FLAME.1_INCH  [SFE_LOGO_FLAME_.1]  70.48,68.2 0 top
LOGO34  SFE_LOGO_NAME_FLAME.1_INCH  [SFE_LOGO_NAME_FLAME_.1]  88.9,60.2 270 bottom
LOGO35  QWIIC_LOGO_6MM  [QWIIC_6MM]  88.9,50.67 0 bottom
LOGO36  SFE_LOGO_FLAME.1_INCH  [SFE_LOGO_FLAME_.1]  93.34,68.2 0 top
LOGO37  SFE_LOGO_NAME_FLAME.1_INCH  [SFE_LOGO_NAME_FLAME_.1]  111.76,60.2 270 bottom
LOGO38  QWIIC_LOGO_6MM  [QWIIC_6MM]  111.76,50.67 0 bottom
LOGO39  SFE_LOGO_FLAME.1_INCH  [SFE_LOGO_FLAME_.1]  116.21,68.2 0 top
LOGO40  SFE_LOGO_NAME_FLAME.1_INCH  [SFE_LOGO_NAME_FLAME_.1]  134.62,60.2 270 bottom
LOGO41  QWIIC_LOGO_6MM  [QWIIC_6MM]  134.62,50.67 0 bottom
LOGO42  SFE_LOGO_FLAME.1_INCH  [SFE_LOGO_FLAME_.1]  139.06,68.2 0 top
LOGO43  SFE_LOGO_NAME_FLAME.1_INCH  [SFE_LOGO_NAME_FLAME_.1]  157.48,60.2 270 bottom
LOGO44  QWIIC_LOGO_6MM  [QWIIC_6MM]  157.48,50.67 0 bottom
LOGO45  SFE_LOGO_FLAME.1_INCH  [SFE_LOGO_FLAME_.1]  161.93,68.2 0 top
LOGO46  SFE_LOGO_NAME_FLAME.1_INCH  [SFE_LOGO_NAME_FLAME_.1]  180.34,60.2 270 bottom
LOGO47  QWIIC_LOGO_6MM  [QWIIC_6MM]  180.34,50.67 0 bottom
LOGO48  SFE_LOGO_FLAME.1_INCH  [SFE_LOGO_FLAME_.1]  184.78,68.2 0 top
LOGO49  SFE_LOGO_NAME_FLAME.1_INCH  [SFE_LOGO_NAME_FLAME_.1]  20.32,99.57 270 bottom
LOGO50  QWIIC_LOGO_6MM  [QWIIC_6MM]  20.32,90.04 0 bottom
LOGO51  SFE_LOGO_FLAME.1_INCH  [SFE_LOGO_FLAME_.1]  24.77,107.57 0 top
LOGO52  SFE_LOGO_NAME_FLAME.1_INCH  [SFE_LOGO_NAME_FLAME_.1]  43.18,99.57 270 bottom
LOGO53  QWIIC_LOGO_6MM  [QWIIC_6MM]  43.18,90.04 0 bottom
LOGO54  SFE_LOGO_FLAME.1_INCH  [SFE_LOGO_FLAME_.1]  47.62,107.57 0 top
LOGO55  SFE_LOGO_NAME_FLAME.1_INCH  [SFE_LOGO_NAME_FLAME_.1]  66.04,99.57 270 bottom
LOGO56  QWIIC_LOGO_6MM  [QWIIC_6MM]  66.04,90.04 0 bottom
LOGO57  SFE_LOGO_FLAME.1_INCH  [SFE_LOGO_FLAME_.1]  70.48,107.57 0 top
LOGO58  SFE_LOGO_NAME_FLAME.1_INCH  [SFE_LOGO_NAME_FLAME_.1]  88.9,99.57 270 bottom
LOGO59  QWIIC_LOGO_6MM  [QWIIC_6MM]  88.9,90.04 0 bottom
LOGO60  SFE_LOGO_FLAME.1_INCH  [SFE_LOGO_FLAME_.1]  93.34,107.57 0 top
LOGO61  SFE_LOGO_NAME_FLAME.1_INCH  [SFE_LOGO_NAME_FLAME_.1]  111.76,99.57 270 bottom
LOGO62  QWIIC_LOGO_6MM  [QWIIC_6MM]  111.76,90.04 0 bottom
LOGO63  SFE_LOGO_FLAME.1_INCH  [SFE_LOGO_FLAME_.1]  116.21,107.57 0 top
LOGO64  SFE_LOGO_NAME_FLAME.1_INCH  [SFE_LOGO_NAME_FLAME_.1]  134.62,99.57 270 bottom
LOGO65  QWIIC_LOGO_6MM  [QWIIC_6MM]  134.62,90.04 0 bottom
LOGO66  SFE_LOGO_FLAME.1_INCH  [SFE_LOGO_FLAME_.1]  139.06,107.57 0 top
LOGO67  SFE_LOGO_NAME_FLAME.1_INCH  [SFE_LOGO_NAME_FLAME_.1]  157.48,99.57 270 bottom
LOGO68  QWIIC_LOGO_6MM  [QWIIC_6MM]  157.48,90.04 0 bottom
LOGO69  SFE_LOGO_FLAME.1_INCH  [SFE_LOGO_FLAME_.1]  161.93,107.57 0 top
LOGO70  SFE_LOGO_NAME_FLAME.1_INCH  [SFE_LOGO_NAME_FLAME_.1]  180.34,99.57 270 bottom
LOGO71  QWIIC_LOGO_6MM  [QWIIC_6MM]  180.34,90.04 0 bottom
LOGO72  SFE_LOGO_FLAME.1_INCH  [SFE_LOGO_FLAME_.1]  184.78,107.57 0 top
PWR  JUMPER-SMT_2_NC_TRACE_SILK  [SMT-JUMPER_2_NC_TRACE_SILK]  13.33,38.61 180 bottom
PWR1  JUMPER-SMT_2_NC_TRACE_SILK  [SMT-JUMPER_2_NC_TRACE_SILK]  36.2,38.61 180 bottom
PWR2  JUMPER-SMT_2_NC_TRACE_SILK  [SMT-JUMPER_2_NC_TRACE_SILK]  59.05,38.61 180 bottom
PWR3  JUMPER-SMT_2_NC_TRACE_SILK  [SMT-JUMPER_2_NC_TRACE_SILK]  81.91,38.61 180 bottom
PWR4  JUMPER-SMT_2_NC_TRACE_SILK  [SMT-JUMPER_2_NC_TRACE_SILK]  104.78,38.61 180 bottom
PWR5  JUMPER-SMT_2_NC_TRACE_SILK  [SMT-JUMPER_2_NC_TRACE_SILK]  127.63,38.61 180 bottom
PWR6  JUMPER-SMT_2_NC_TRACE_SILK  [SMT-JUMPER_2_NC_TRACE_SILK]  150.5,38.61 180 bottom
PWR7  JUMPER-SMT_2_NC_TRACE_SILK  [SMT-JUMPER_2_NC_TRACE_SILK]  173.36,38.61 180 bottom
PWR8  JUMPER-SMT_2_NC_TRACE_SILK  [SMT-JUMPER_2_NC_TRACE_SILK]  13.33,77.98 180 bottom
PWR9  JUMPER-SMT_2_NC_TRACE_SILK  [SMT-JUMPER_2_NC_TRACE_SILK]  36.2,77.98 180 bottom
PWR10  JUMPER-SMT_2_NC_TRACE_SILK  [SMT-JUMPER_2_NC_TRACE_SILK]  59.05,77.98 180 bottom
PWR11  JUMPER-SMT_2_NC_TRACE_SILK  [SMT-JUMPER_2_NC_TRACE_SILK]  81.91,77.98 180 bottom
PWR12  JUMPER-SMT_2_NC_TRACE_SILK  [SMT-JUMPER_2_NC_TRACE_SILK]  104.78,77.98 180 bottom